# EAGLE board Stereo_Audio_Codec_Breakout_WM8960-Panel (EAGLE 9.6.2), part 1 of 5
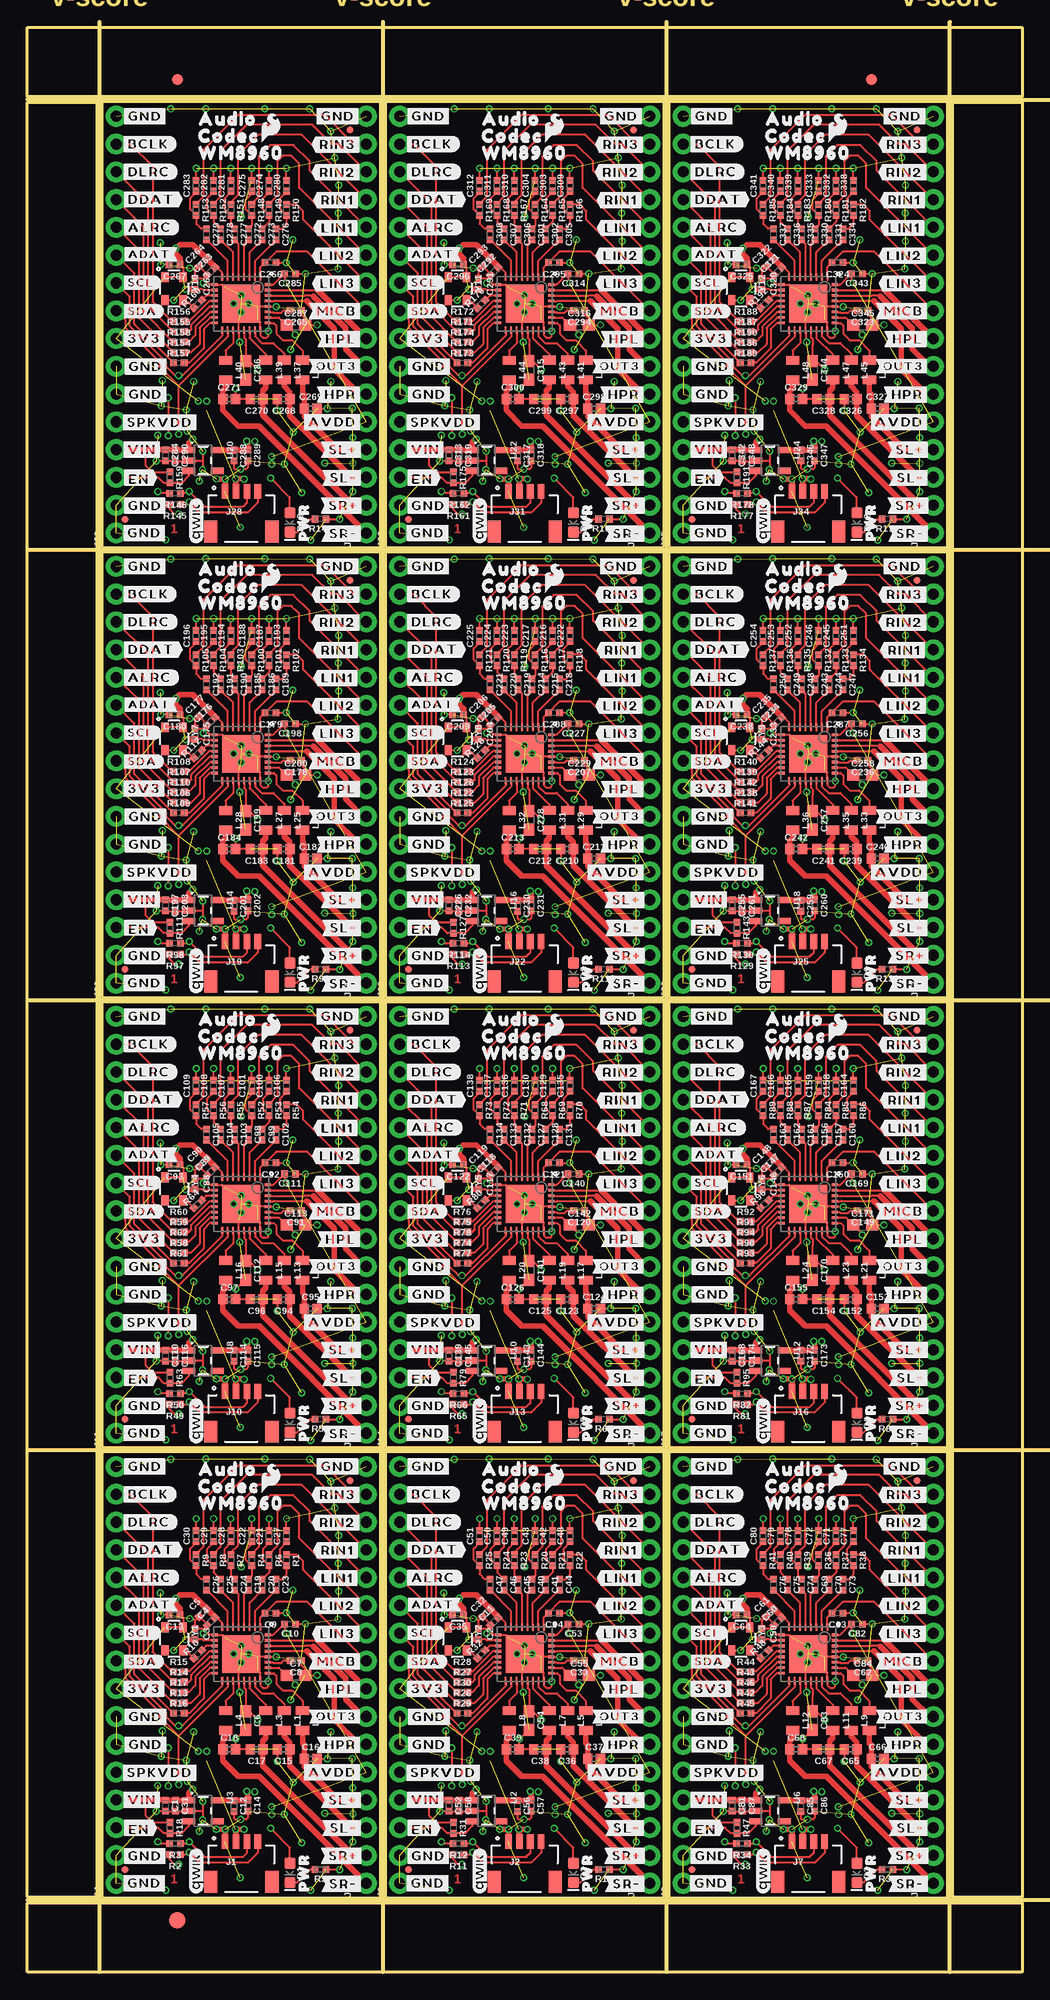
[diagram p0: board, top side]
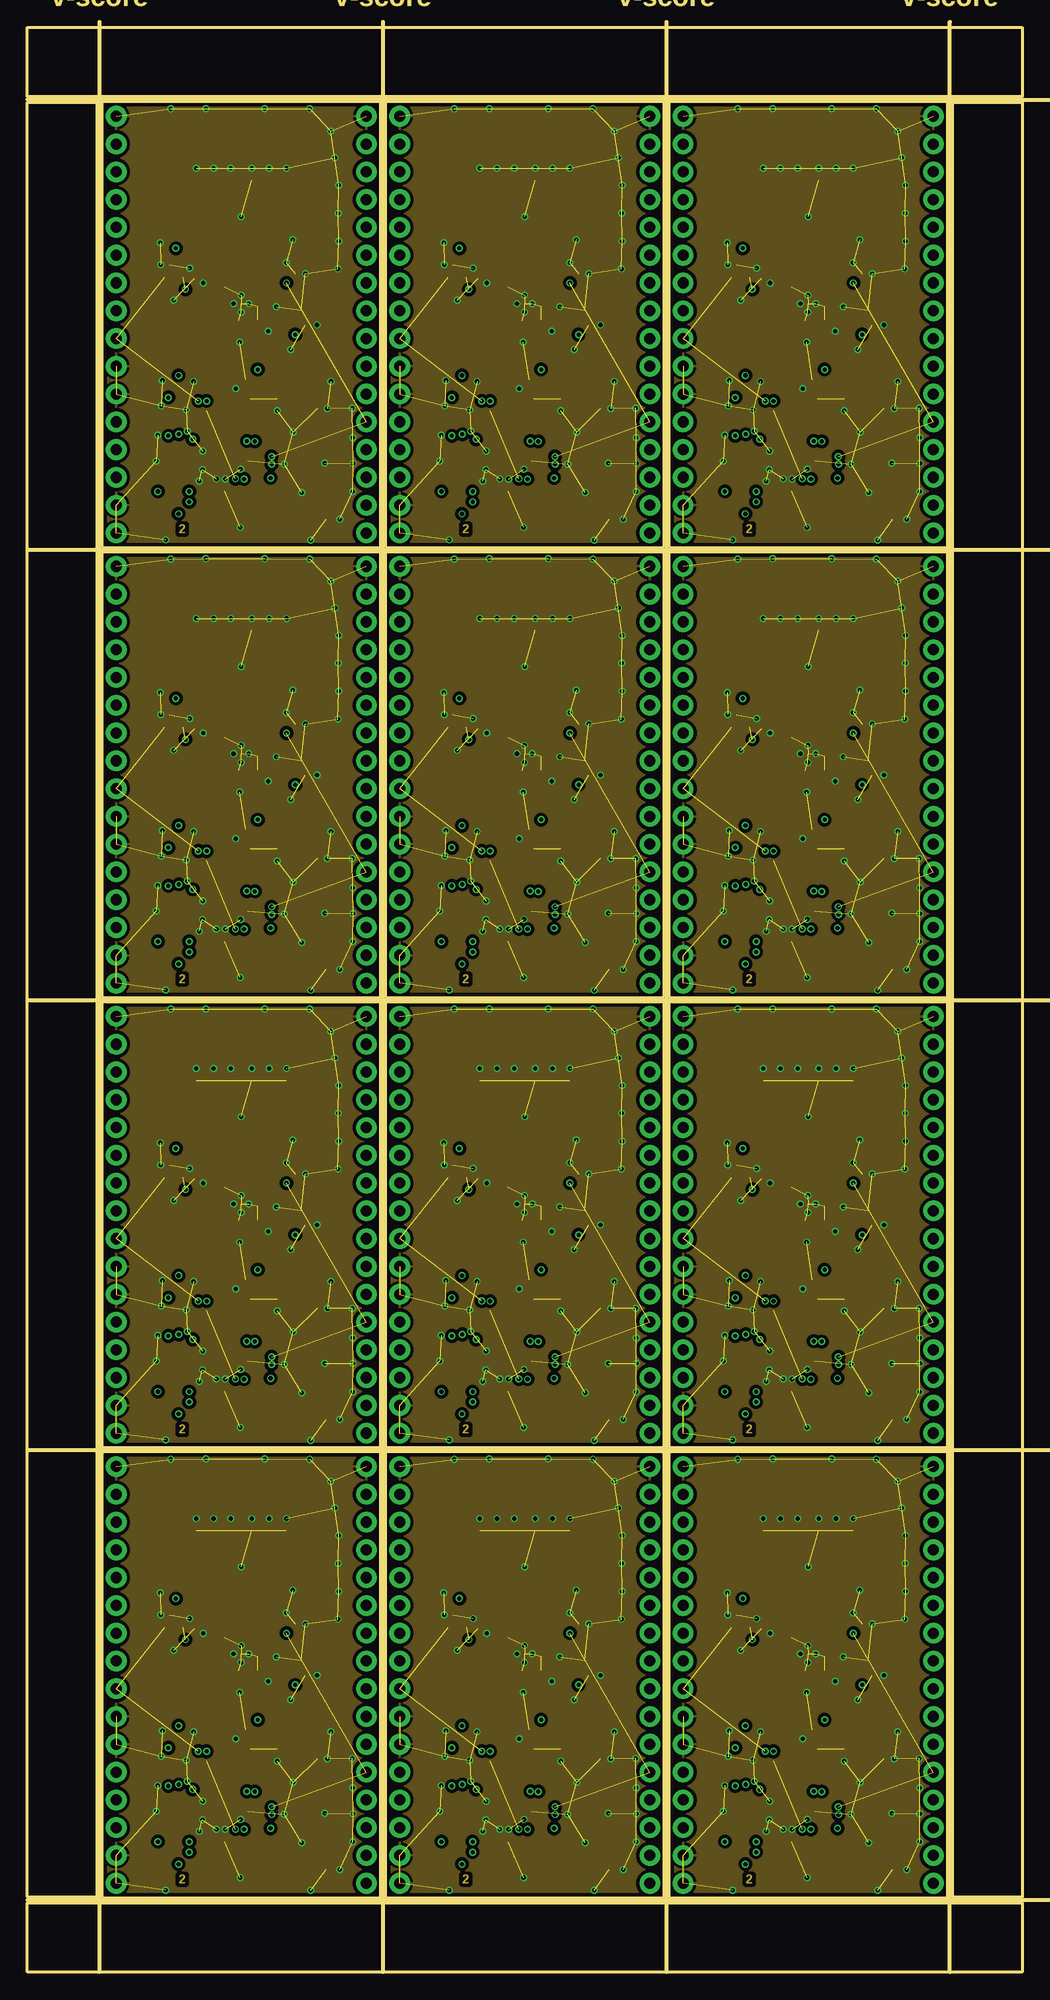
[diagram p1: board, inner layer Route2]
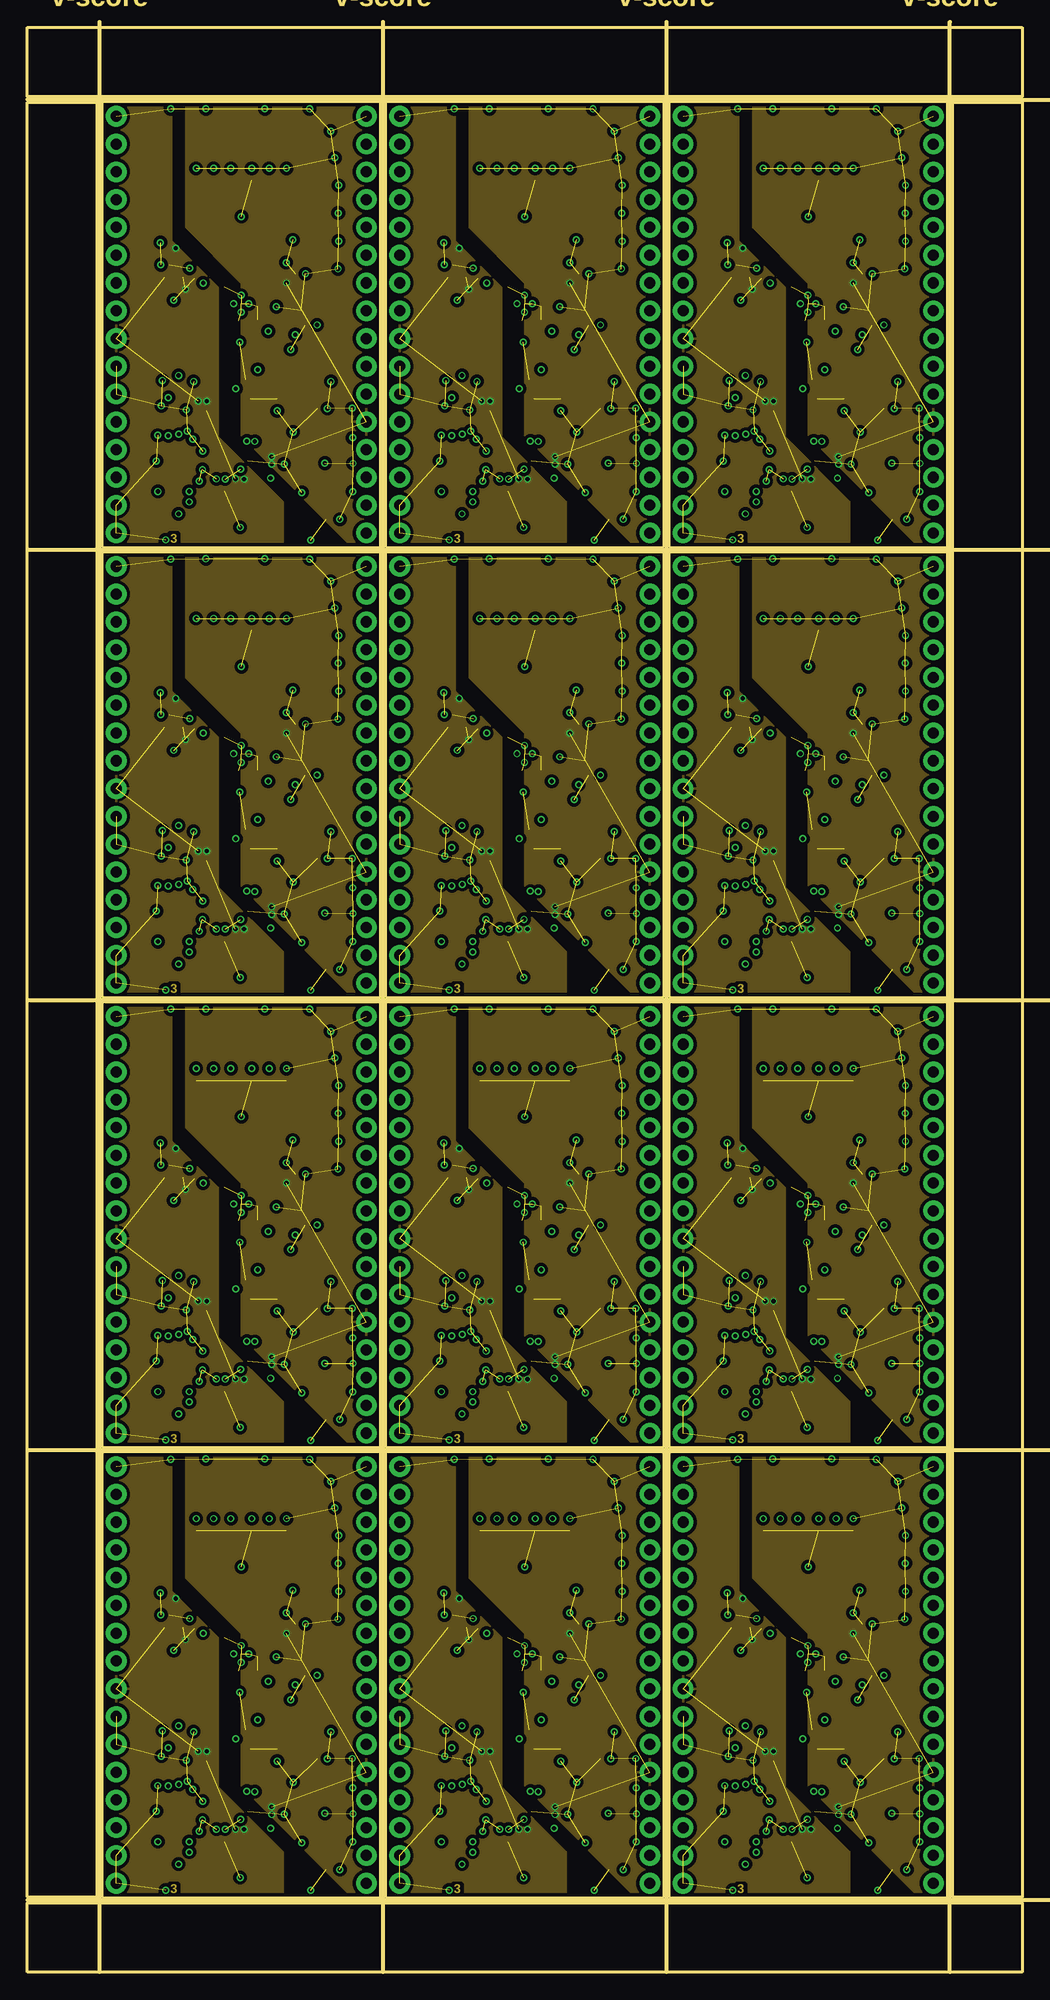
[diagram p2: board, inner layer Route15]
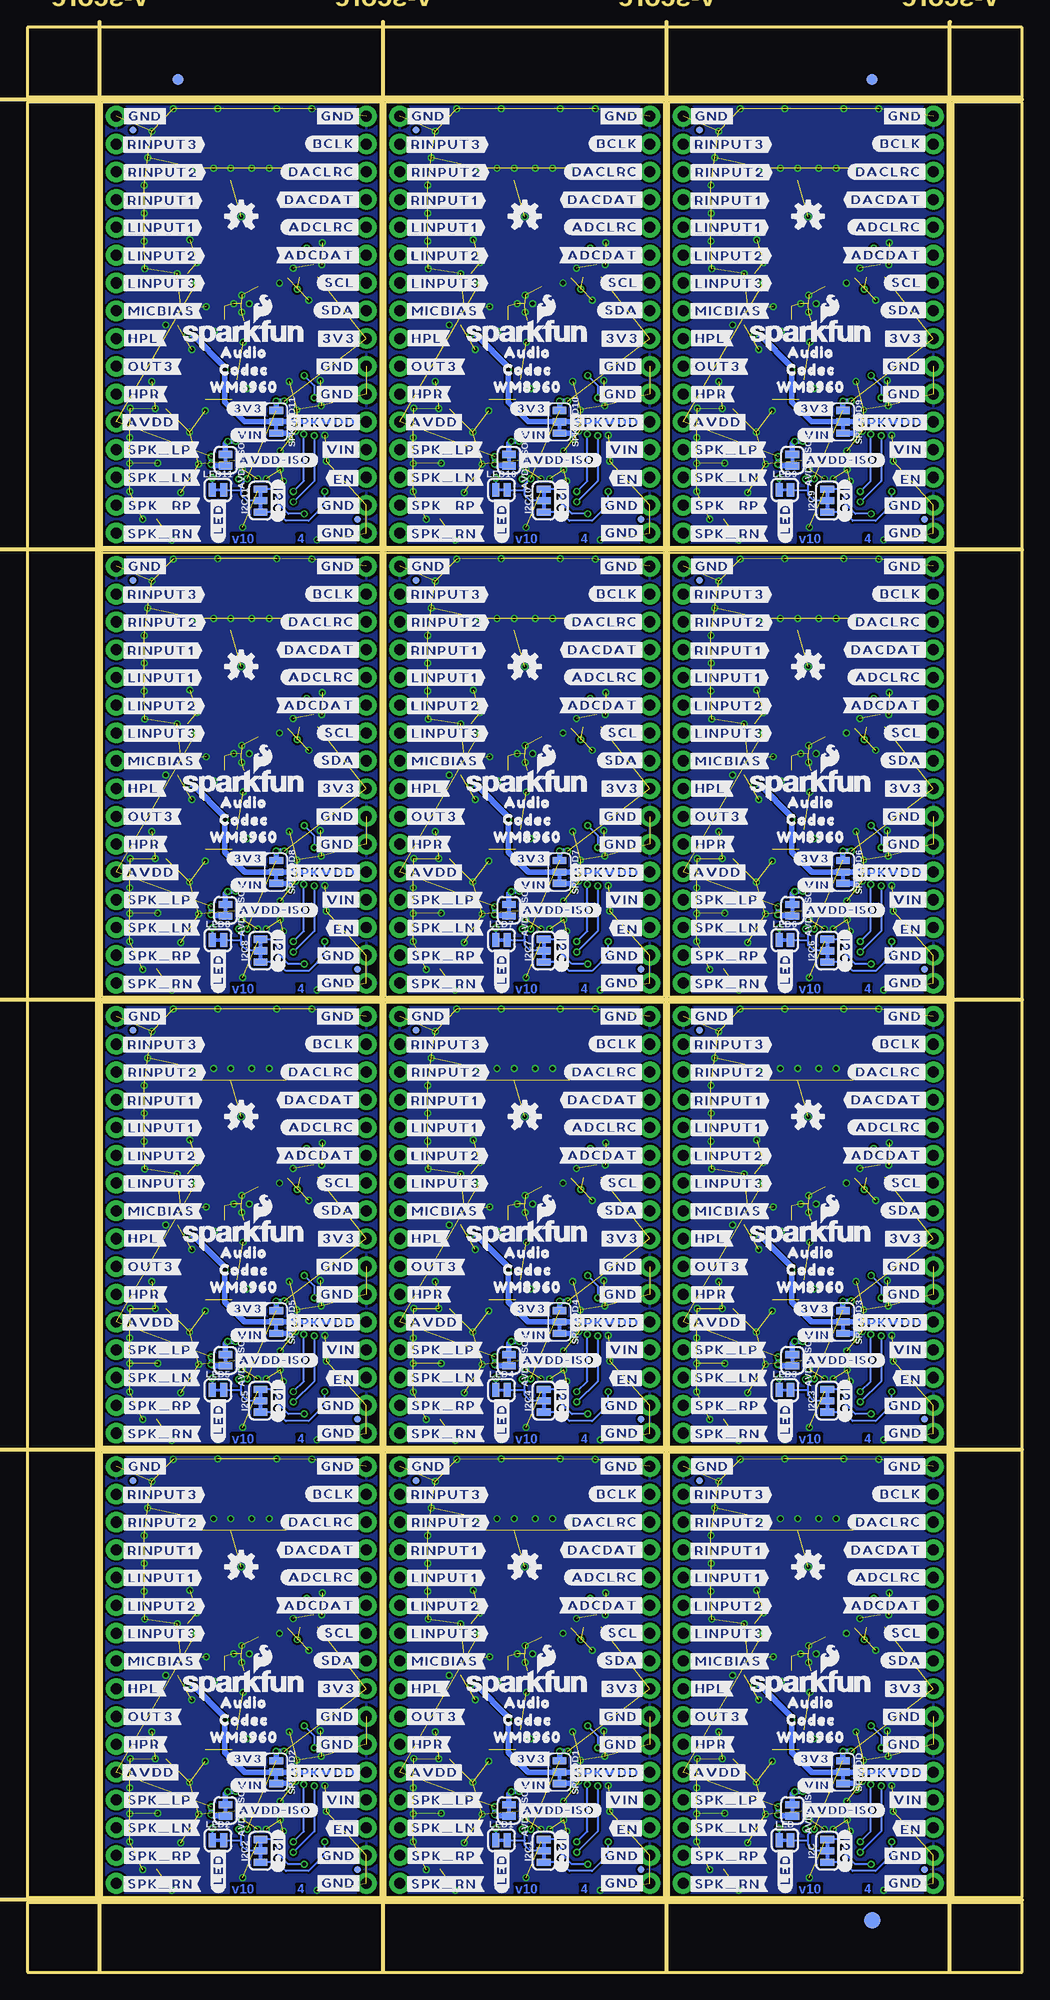
[diagram p3: board, bottom side, seen from below]

Size 90.93 x 177.8 mm. Coordinates in mm from the lower left corner, seen from the top.
Outline: 6.86,6.86 32.26,6.86 32.26,47.5 6.86,47.5 6.86,6.86
Outline: 32.77,6.86 58.17,6.86 58.17,47.5 32.77,47.5 32.77,6.86
Outline: 58.67,6.86 84.07,6.86 84.07,47.5 58.67,47.5 58.67,6.86
Outline: 6.86,48.01 32.26,48.01 32.26,88.65 6.86,88.65 6.86,48.01
Outline: 32.77,48.01 58.17,48.01 58.17,88.65 32.77,88.65 32.77,48.01
Outline: 58.67,48.01 84.07,48.01 84.07,88.65 58.67,88.65 58.67,48.01
Outline: 6.86,89.15 32.26,89.15 32.26,129.79 6.86,129.79 6.86,89.15
Outline: 32.77,89.15 58.17,89.15 58.17,129.79 32.77,129.79 32.77,89.15
Outline: 58.67,89.15 84.07,89.15 84.07,129.79 58.67,129.79 58.67,89.15
Outline: 6.86,130.3 32.26,130.3 32.26,170.94 6.86,170.94 6.86,130.3
Outline: 32.77,130.3 58.17,130.3 58.17,170.94 32.77,170.94 32.77,130.3
Outline: 58.67,130.3 84.07,130.3 84.07,170.94 58.67,170.94 58.67,130.3
Outline: 0,6.35 90.93,6.35 90.93,0 0,0 0,6.35
Outline: 84.58,170.94 90.93,170.94 90.93,6.86 84.58,6.86 84.58,170.94
Outline: 0,177.8 90.93,177.8 90.93,171.45 0,171.45 0,177.8
Outline: 0,170.94 6.35,170.94 6.35,6.86 0,6.86 0,170.94
Copper layers (1*2*15*16): Top 0.035559375mm / dielectric 0.47751875mm / Route2 0.035559375mm / dielectric 0.47751875mm / Route15 0.035559375mm / dielectric 0.47751875mm / Bottom 0.035559375mm
Design rules "Stereo_Audio_Codec_Breakout_WM8960": minimum track width 5mil, minimum drill 0.2mm, track to track 5mil, track to pad 5mil, pad to pad 5mil, via to via 5mil, smd to smd 5mil, copper to edge 7mil, drill to drill 7mil, minimum pad ring 5mil, minimum via ring 5mil, stop-mask expansion 2.5mil, vias tented up to drill 25mil, thermal gap 10mil
tRestrict: area 21.4,29.1 to 21.5,29.3; area 19.4,30.9 to 19.7,31; area 17.6,29 to 17.7,29.2; area 19.6,27.1 to 19.9,27.3; area 47.3,29.1 to 47.4,29.3; area 45.3,30.9 to 45.6,31; area 43.5,29 to 43.6,29.2; area 45.5,27.1 to 45.8,27.3; area 73.2,29.1 to 73.3,29.3; area 71.2,30.9 to 71.5,31; area 69.4,29 to 69.5,29.2; area 71.4,27.1 to 71.7,27.3; area 21.4,70.2 to 21.5,70.4; area 19.4,72.1 to 19.7,72.2; area 17.6,70.1 to 17.7,70.4; area 19.6,68.3 to 19.9,68.4; area 47.3,70.2 to 47.4,70.4; area 45.3,72.1 to 45.6,72.2; area 43.5,70.1 to 43.6,70.4; area 45.5,68.3 to 45.8,68.4; area 73.2,70.2 to 73.3,70.4; area 71.2,72.1 to 71.5,72.2; area 69.4,70.1 to 69.5,70.4; area 71.4,68.3 to 71.7,68.4; area 21.4,111.4 to 21.5,111.6; area 19.4,113.2 to 19.7,113.3; area 17.6,111.3 to 17.7,111.5; area 19.6,109.4 to 19.9,109.6; area 47.3,111.4 to 47.4,111.6; area 45.3,113.2 to 45.6,113.3; area 43.5,111.3 to 43.6,111.5; area 45.5,109.4 to 45.8,109.6; area 73.2,111.4 to 73.3,111.6; area 71.2,113.2 to 71.5,113.3; area 69.4,111.3 to 69.5,111.5; area 71.4,109.4 to 71.7,109.6; area 21.4,152.5 to 21.5,152.7; area 19.4,154.4 to 19.7,154.5; area 17.6,152.4 to 17.7,152.7; area 19.6,150.6 to 19.9,150.7; area 47.3,152.5 to 47.4,152.7; area 45.3,154.4 to 45.6,154.5; area 43.5,152.4 to 43.6,152.7; area 45.5,150.6 to 45.8,150.7; area 73.2,152.5 to 73.3,152.7; area 71.2,154.4 to 71.5,154.5; area 69.4,152.4 to 69.5,152.7; area 71.4,150.6 to 71.7,150.7
Milling: 9 lines

## Footprints (pad centres in the part's own frame; a part is rotated, then mirrored left to right if it is on the bottom)
SMT-JUMPER_2_NC_TRACE_SILK = smd 0.66 x 1.27: 1 -0.521,0; 2 0.521,0
0402-TIGHT = smd 0.6 x 0.6: 1 -0.5,0; 2 0.5,0
0603 = smd 1.1 x 1: 1 -0.85,0; 2 0.85,0
0402 = smd 0.85 x 0.9: 1 -0.58,0; 2 0.58,0
LED-0603 = smd 1 x 1: A -0.877,0; C 0.877,0
FIDUCIAL-1X2 = smd 1 x 1: 1 0,0
FIDUCIAL-1.5X3 = smd 1.5 x 1.5: 1 0,0
FIDUCIAL-MICRO = smd 0.635 x 0.635: 1 0,0
SMT-JUMPER_3_2-NC_TRACE_SILK = smd 0.66 x 1.27: 1 -1.041,0; 2 0,0; 3 1.041,0
JST04_1MM_RA = smd 0.6 x 1.35: 1 -1.5,0; 2 -0.5,0; 3 0.5,0; 4 1.5,0 | smd 1.2 x 2: NC1 2.8,-3.675; NC2 -2.8,-3.675
1X16_NO_SILK = drill 1.016 pad 1.88: 1 0,0; 2 2.54,0; 3 5.08,0; 4 7.62,0; 5 10.16,0; 6 12.7,0; 7 15.24,0; 8 17.78,0; 9 20.32,0; 10 22.86,0; 11 25.4,0; 12 27.94,0; 13 30.48,0; 14 33.02,0; 15 35.56,0; 16 38.1,0
0805 = smd 0.8 x 1.2: 1 -0.9,0; 2 0.9,0
SMT-JUMPER_3_1-NC_TRACE_SILK = smd 0.66 x 1.27: 1 -1.041,0; 2 0,0; 3 1.041,0
QFN-32 = smd 0.654 x 0.25: 1 -2.427,1.75; 2 -2.427,1.25; 3 -2.427,0.75; 4 -2.427,0.25; 5 -2.427,-0.25; 6 -2.427,-0.75; 7 -2.427,-1.25; 8 -2.427,-1.75; 17 2.427,-1.75; 18 2.427,-1.25; 19 2.427,-0.75; 20 2.427,-0.25; 21 2.427,0.25; 22 2.427,0.75; 23 2.427,1.25; 24 2.427,1.75 | smd 0.25 x 0.654: 9 -1.75,-2.427; 10 -1.25,-2.427; 11 -0.75,-2.427; 12 -0.25,-2.427; 13 0.25,-2.427; 14 0.75,-2.427; 15 1.25,-2.427; 16 1.75,-2.427; 25 1.75,2.427; 26 1.25,2.427; 27 0.75,2.427; 28 0.25,2.427; 29 -0.25,2.427; 30 -0.75,2.427; 31 -1.25,2.427; 32 -1.75,2.427 | smd 3.45 x 3.45: PADDLE 0,0
SOT23-5 = smd 0.55 x 1.2: 1 -0.95,-1.3; 2 0,-1.3; 3 0.95,-1.3; 4 0.95,1.3; 5 -0.95,1.3
RESONATOR-SMD-3.2X2.5 = smd 0.9 x 0.65: 1 -1.05,-0.825; 2 1.05,-0.825; 3 1.05,0.825; 4 -1.05,0.825

## Placement (x,y rotation side)
AVDD-ISO  [SMT-JUMPER_2_NC_TRACE_SILK]  21.01,14.79 270 bottom
AVDD-ISO1  [SMT-JUMPER_2_NC_TRACE_SILK]  46.91,14.79 270 bottom
AVDD-ISO2  [SMT-JUMPER_2_NC_TRACE_SILK]  72.82,14.79 270 bottom
AVDD-ISO3  [SMT-JUMPER_2_NC_TRACE_SILK]  21.01,55.93 270 bottom
AVDD-ISO4  [SMT-JUMPER_2_NC_TRACE_SILK]  46.91,55.93 270 bottom
AVDD-ISO5  [SMT-JUMPER_2_NC_TRACE_SILK]  72.82,55.93 270 bottom
AVDD-ISO6  [SMT-JUMPER_2_NC_TRACE_SILK]  21.01,97.08 270 bottom
AVDD-ISO7  [SMT-JUMPER_2_NC_TRACE_SILK]  46.91,97.08 270 bottom
AVDD-ISO8  [SMT-JUMPER_2_NC_TRACE_SILK]  72.82,97.08 270 bottom
AVDD-ISO9  [SMT-JUMPER_2_NC_TRACE_SILK]  21.01,138.23 270 bottom
AVDD-ISO10  [SMT-JUMPER_2_NC_TRACE_SILK]  46.91,138.23 270 bottom
AVDD-ISO11  [SMT-JUMPER_2_NC_TRACE_SILK]  72.82,138.23 270 bottom
C1  0.1uF  [0402-TIGHT]  12.61,15.23 270 top
C2  0.1uF  [0402-TIGHT]  41.22,30.91 270 top
C3  0.1uF  [0402-TIGHT]  15.31,30.91 270 top
C4  0.1uF  [0402-TIGHT]  16.79,32.06 45 top
C5  0.1uF  [0402-TIGHT]  16.05,32.87 45 top
C6  4.7uF  [0603]  19.94,23.01 270 top
C7  4.7uF  [0603]  24.54,27.14 0 top
C8  4.7uF  [0402-TIGHT]  24.53,28.49 180 top
C9  4.7uF  [0402-TIGHT]  22.23,32.85 180 top
C10  0.1uF  [0402-TIGHT]  24,31.83 180 top
C11  0.1uF  [0402-TIGHT]  42.69,32.06 45 top
C12  1.0uF  [0402-TIGHT]  18.87,15.2 270 top
C13  10nF  [0402-TIGHT]  13.46,32.66 180 top
C14  10uF  [0402-TIGHT]  20.14,15.23 270 top
C15  1nF  [0402]  23.42,20.37 180 top
C16  1nF  [0402]  25.9,19.51 0 top
C17  1nF  [0402]  20.95,20.38 180 top
C18  1nF  [0402]  18.45,20.37 0 top
C19  1.0uF  [0402-TIGHT]  20.19,35.43 270 top
C20  1.0uF  [0402-TIGHT]  21.46,35.43 270 top
C21  47nF  [0402-TIGHT]  22.1,39.88 90 top
C22  47nF  [0402-TIGHT]  20.51,39.88 90 top
C23  1.0uF  [0402-TIGHT]  22.73,35.43 270 top
C24  1.0uF  [0402-TIGHT]  18.92,35.43 270 top
C25  1.0uF  [0402-TIGHT]  17.65,35.43 270 top
C26  1.0uF  [0402-TIGHT]  16.38,35.43 270 top
C27  47nF  [0402-TIGHT]  23.69,39.88 90 top
C28  47nF  [0402-TIGHT]  18.61,39.88 90 top
C29  47nF  [0402-TIGHT]  17.02,39.88 90 top
C30  47nF  [0402-TIGHT]  15.43,39.88 90 top
C31  10uF  [0402-TIGHT]  13.53,15.21 270 top
C32  0.1uF  [0402-TIGHT]  41.96,32.87 45 top
C33  4.7uF  [0402-TIGHT]  50.44,28.49 180 top
C34  4.7uF  [0402-TIGHT]  48.13,32.85 180 top
C35  10nF  [0402-TIGHT]  39.37,32.66 180 top
C36  1nF  [0402]  49.33,20.37 180 top
C37  1nF  [0402]  51.8,19.51 0 top
C38  1nF  [0402]  46.86,20.38 180 top
C39  1nF  [0402]  44.36,20.37 0 top
C40  1.0uF  [0402-TIGHT]  46.1,35.43 270 top
C41  1.0uF  [0402-TIGHT]  47.37,35.43 270 top
C42  47nF  [0402-TIGHT]  48.01,39.88 90 top
C43  47nF  [0402-TIGHT]  46.42,39.88 90 top
C44  1.0uF  [0402-TIGHT]  48.64,35.43 270 top
C45  1.0uF  [0402-TIGHT]  44.83,35.43 270 top
C46  1.0uF  [0402-TIGHT]  43.56,35.43 270 top
C47  1.0uF  [0402-TIGHT]  42.29,35.43 270 top
C48  47nF  [0402-TIGHT]  49.59,39.88 90 top
C49  47nF  [0402-TIGHT]  44.51,39.88 90 top
C50  47nF  [0402-TIGHT]  42.93,39.88 90 top
C51  47nF  [0402-TIGHT]  41.34,39.88 90 top
C52  0.1uF  [0402-TIGHT]  38.52,15.23 270 top
C53  0.1uF  [0402-TIGHT]  49.91,31.83 180 top
C54  4.7uF  [0603]  45.85,23.01 270 top
C55  4.7uF  [0603]  50.45,27.14 0 top
C56  1.0uF  [0402-TIGHT]  44.78,15.2 270 top
C57  10uF  [0402-TIGHT]  46.05,15.23 270 top
C58  10uF  [0402-TIGHT]  39.43,15.21 270 top
C59  0.1uF  [0402-TIGHT]  67.13,30.91 270 top
C60  0.1uF  [0402-TIGHT]  68.6,32.06 45 top
C61  0.1uF  [0402-TIGHT]  67.87,32.87 45 top
C62  4.7uF  [0402-TIGHT]  76.35,28.49 180 top
C63  4.7uF  [0402-TIGHT]  74.04,32.85 180 top
C64  10nF  [0402-TIGHT]  65.28,32.66 180 top
C65  1nF  [0402]  75.24,20.37 180 top
C66  1nF  [0402]  77.71,19.51 0 top
C67  1nF  [0402]  72.77,20.38 180 top
C68  1nF  [0402]  70.27,20.37 0 top
C69  1.0uF  [0402-TIGHT]  72.01,35.43 270 top
C70  1.0uF  [0402-TIGHT]  73.28,35.43 270 top
C71  47nF  [0402-TIGHT]  73.91,39.88 90 top
C72  47nF  [0402-TIGHT]  72.33,39.88 90 top
C73  1.0uF  [0402-TIGHT]  74.55,35.43 270 top
C74  1.0uF  [0402-TIGHT]  70.74,35.43 270 top
C75  1.0uF  [0402-TIGHT]  69.47,35.43 270 top
C76  1.0uF  [0402-TIGHT]  68.2,35.43 270 top
C77  47nF  [0402-TIGHT]  75.5,39.88 90 top
C78  47nF  [0402-TIGHT]  70.42,39.88 90 top
C79  47nF  [0402-TIGHT]  68.83,39.88 90 top
C80  47nF  [0402-TIGHT]  67.25,39.88 90 top
C81  0.1uF  [0402-TIGHT]  64.43,15.23 270 top
C82  0.1uF  [0402-TIGHT]  75.82,31.83 180 top
C83  4.7uF  [0603]  71.76,23.01 270 top
C84  4.7uF  [0603]  76.35,27.14 0 top
C85  1.0uF  [0402-TIGHT]  70.69,15.2 270 top
C86  10uF  [0402-TIGHT]  71.96,15.23 270 top
C87  10uF  [0402-TIGHT]  65.34,15.21 270 top
C88  0.1uF  [0402-TIGHT]  15.31,72.06 270 top
C89  0.1uF  [0402-TIGHT]  16.79,73.2 45 top
C90  0.1uF  [0402-TIGHT]  16.05,74.02 45 top
C91  4.7uF  [0402-TIGHT]  24.53,69.63 180 top
C92  4.7uF  [0402-TIGHT]  22.23,73.99 180 top
C93  10nF  [0402-TIGHT]  13.46,73.81 180 top
C94  1nF  [0402]  23.42,61.52 180 top
C95  1nF  [0402]  25.9,60.66 0 top
C96  1nF  [0402]  20.95,61.52 180 top
C97  1nF  [0402]  18.45,61.52 0 top
C98  1.0uF  [0402-TIGHT]  20.19,76.58 270 top
C99  1.0uF  [0402-TIGHT]  21.46,76.58 270 top
C100  47nF  [0402-TIGHT]  22.1,81.03 90 top
C101  47nF  [0402-TIGHT]  20.51,81.03 90 top
C102  1.0uF  [0402-TIGHT]  22.73,76.58 270 top
C103  1.0uF  [0402-TIGHT]  18.92,76.58 270 top
C104  1.0uF  [0402-TIGHT]  17.65,76.58 270 top
C105  1.0uF  [0402-TIGHT]  16.38,76.58 270 top
C106  47nF  [0402-TIGHT]  23.69,81.03 90 top
C107  47nF  [0402-TIGHT]  18.61,81.03 90 top
C108  47nF  [0402-TIGHT]  17.02,81.03 90 top
C109  47nF  [0402-TIGHT]  15.43,81.03 90 top
C110  0.1uF  [0402-TIGHT]  12.61,56.38 270 top
C111  0.1uF  [0402-TIGHT]  24,72.97 180 top
C112  4.7uF  [0603]  19.94,64.16 270 top
C113  4.7uF  [0603]  24.54,68.29 0 top
C114  1.0uF  [0402-TIGHT]  18.87,56.35 270 top
C115  10uF  [0402-TIGHT]  20.14,56.38 270 top
C116  10uF  [0402-TIGHT]  13.53,56.36 270 top
C117  0.1uF  [0402-TIGHT]  41.22,72.06 270 top
C118  0.1uF  [0402-TIGHT]  42.69,73.2 45 top
C119  0.1uF  [0402-TIGHT]  41.96,74.02 45 top
C120  4.7uF  [0402-TIGHT]  50.44,69.63 180 top
C121  4.7uF  [0402-TIGHT]  48.13,73.99 180 top
C122  10nF  [0402-TIGHT]  39.37,73.81 180 top
C123  1nF  [0402]  49.33,61.52 180 top
C124  1nF  [0402]  51.8,60.66 0 top
C125  1nF  [0402]  46.86,61.52 180 top
C126  1nF  [0402]  44.36,61.52 0 top
C127  1.0uF  [0402-TIGHT]  46.1,76.58 270 top
C128  1.0uF  [0402-TIGHT]  47.37,76.58 270 top
C129  47nF  [0402-TIGHT]  48.01,81.03 90 top
C130  47nF  [0402-TIGHT]  46.42,81.03 90 top
C131  1.0uF  [0402-TIGHT]  48.64,76.58 270 top
C132  1.0uF  [0402-TIGHT]  44.83,76.58 270 top
C133  1.0uF  [0402-TIGHT]  43.56,76.58 270 top
C134  1.0uF  [0402-TIGHT]  42.29,76.58 270 top
C135  47nF  [0402-TIGHT]  49.59,81.03 90 top
C136  47nF  [0402-TIGHT]  44.51,81.03 90 top
C137  47nF  [0402-TIGHT]  42.93,81.03 90 top
C138  47nF  [0402-TIGHT]  41.34,81.03 90 top
C139  0.1uF  [0402-TIGHT]  38.52,56.38 270 top
C140  0.1uF  [0402-TIGHT]  49.91,72.97 180 top
C141  4.7uF  [0603]  45.85,64.16 270 top
C142  4.7uF  [0603]  50.45,68.29 0 top
C143  1.0uF  [0402-TIGHT]  44.78,56.35 270 top
C144  10uF  [0402-TIGHT]  46.05,56.38 270 top
C145  10uF  [0402-TIGHT]  39.43,56.36 270 top
C146  0.1uF  [0402-TIGHT]  67.13,72.06 270 top
C147  0.1uF  [0402-TIGHT]  68.6,73.2 45 top
C148  0.1uF  [0402-TIGHT]  67.87,74.02 45 top
C149  4.7uF  [0402-TIGHT]  76.35,69.63 180 top
C150  4.7uF  [0402-TIGHT]  74.04,73.99 180 top
C151  10nF  [0402-TIGHT]  65.28,73.81 180 top
C152  1nF  [0402]  75.24,61.52 180 top
C153  1nF  [0402]  77.71,60.66 0 top
C154  1nF  [0402]  72.77,61.52 180 top
C155  1nF  [0402]  70.27,61.52 0 top
C156  1.0uF  [0402-TIGHT]  72.01,76.58 270 top
C157  1.0uF  [0402-TIGHT]  73.28,76.58 270 top
C158  47nF  [0402-TIGHT]  73.91,81.03 90 top
C159  47nF  [0402-TIGHT]  72.33,81.03 90 top
C160  1.0uF  [0402-TIGHT]  74.55,76.58 270 top
C161  1.0uF  [0402-TIGHT]  70.74,76.58 270 top
C162  1.0uF  [0402-TIGHT]  69.47,76.58 270 top
C163  1.0uF  [0402-TIGHT]  68.2,76.58 270 top
C164  47nF  [0402-TIGHT]  75.5,81.03 90 top
C165  47nF  [0402-TIGHT]  70.42,81.03 90 top
C166  47nF  [0402-TIGHT]  68.83,81.03 90 top
C167  47nF  [0402-TIGHT]  67.25,81.03 90 top
C168  0.1uF  [0402-TIGHT]  64.43,56.38 270 top
C169  0.1uF  [0402-TIGHT]  75.82,72.97 180 top
C170  4.7uF  [0603]  71.76,64.16 270 top
C171  4.7uF  [0603]  76.35,68.29 0 top
C172  1.0uF  [0402-TIGHT]  70.69,56.35 270 top
C173  10uF  [0402-TIGHT]  71.96,56.38 270 top
C174  10uF  [0402-TIGHT]  65.34,56.36 270 top
C175  0.1uF  [0402-TIGHT]  15.31,113.21 270 top
C176  0.1uF  [0402-TIGHT]  16.79,114.35 45 top
C177  0.1uF  [0402-TIGHT]  16.05,115.17 45 top
C178  4.7uF  [0402-TIGHT]  24.53,110.78 180 top
C179  4.7uF  [0402-TIGHT]  22.23,115.14 180 top
C180  10nF  [0402-TIGHT]  13.46,114.96 180 top
C181  1nF  [0402]  23.42,102.67 180 top
C182  1nF  [0402]  25.9,101.81 0 top
C183  1nF  [0402]  20.95,102.67 180 top
C184  1nF  [0402]  18.45,102.67 0 top
C185  1.0uF  [0402-TIGHT]  20.19,117.73 270 top
C186  1.0uF  [0402-TIGHT]  21.46,117.73 270 top
C187  47nF  [0402-TIGHT]  22.1,122.17 90 top
C188  47nF  [0402-TIGHT]  20.51,122.17 90 top
C189  1.0uF  [0402-TIGHT]  22.73,117.73 270 top
C190  1.0uF  [0402-TIGHT]  18.92,117.73 270 top
C191  1.0uF  [0402-TIGHT]  17.65,117.73 270 top
C192  1.0uF  [0402-TIGHT]  16.38,117.73 270 top
C193  47nF  [0402-TIGHT]  23.69,122.17 90 top
C194  47nF  [0402-TIGHT]  18.61,122.17 90 top
C195  47nF  [0402-TIGHT]  17.02,122.17 90 top
C196  47nF  [0402-TIGHT]  15.43,122.17 90 top
C197  0.1uF  [0402-TIGHT]  12.61,97.52 270 top
C198  0.1uF  [0402-TIGHT]  24,114.12 180 top
C199  4.7uF  [0603]  19.94,105.3 270 top
C200  4.7uF  [0603]  24.54,109.44 0 top
C201  1.0uF  [0402-TIGHT]  18.87,97.5 270 top
C202  10uF  [0402-TIGHT]  20.14,97.52 270 top
C203  10uF  [0402-TIGHT]  13.53,97.51 270 top
C204  0.1uF  [0402-TIGHT]  41.22,113.21 270 top
C205  0.1uF  [0402-TIGHT]  42.69,114.35 45 top
C206  0.1uF  [0402-TIGHT]  41.96,115.17 45 top
C207  4.7uF  [0402-TIGHT]  50.44,110.78 180 top
C208  4.7uF  [0402-TIGHT]  48.13,115.14 180 top
C209  10nF  [0402-TIGHT]  39.37,114.96 180 top
C210  1nF  [0402]  49.33,102.67 180 top
C211  1nF  [0402]  51.8,101.81 0 top
C212  1nF  [0402]  46.86,102.67 180 top
C213  1nF  [0402]  44.36,102.67 0 top
C214  1.0uF  [0402-TIGHT]  46.1,117.73 270 top
C215  1.0uF  [0402-TIGHT]  47.37,117.73 270 top
C216  47nF  [0402-TIGHT]  48.01,122.17 90 top
C217  47nF  [0402-TIGHT]  46.42,122.17 90 top
C218  1.0uF  [0402-TIGHT]  48.64,117.73 270 top
C219  1.0uF  [0402-TIGHT]  44.83,117.73 270 top
C220  1.0uF  [0402-TIGHT]  43.56,117.73 270 top
C221  1.0uF  [0402-TIGHT]  42.29,117.73 270 top
C222  47nF  [0402-TIGHT]  49.59,122.17 90 top
C223  47nF  [0402-TIGHT]  44.51,122.17 90 top
C224  47nF  [0402-TIGHT]  42.93,122.17 90 top
C225  47nF  [0402-TIGHT]  41.34,122.17 90 top
C226  0.1uF  [0402-TIGHT]  38.52,97.52 270 top
C227  0.1uF  [0402-TIGHT]  49.91,114.12 180 top
C228  4.7uF  [0603]  45.85,105.3 270 top
C229  4.7uF  [0603]  50.45,109.44 0 top
C230  1.0uF  [0402-TIGHT]  44.78,97.5 270 top
C231  10uF  [0402-TIGHT]  46.05,97.52 270 top
C232  10uF  [0402-TIGHT]  39.43,97.51 270 top
C233  0.1uF  [0402-TIGHT]  67.13,113.21 270 top
C234  0.1uF  [0402-TIGHT]  68.6,114.35 45 top
C235  0.1uF  [0402-TIGHT]  67.87,115.17 45 top
C236  4.7uF  [0402-TIGHT]  76.35,110.78 180 top
C237  4.7uF  [0402-TIGHT]  74.04,115.14 180 top
C238  10nF  [0402-TIGHT]  65.28,114.96 180 top
C239  1nF  [0402]  75.24,102.67 180 top
C240  1nF  [0402]  77.71,101.81 0 top
C241  1nF  [0402]  72.77,102.67 180 top
C242  1nF  [0402]  70.27,102.67 0 top
C243  1.0uF  [0402-TIGHT]  72.01,117.73 270 top
C244  1.0uF  [0402-TIGHT]  73.28,117.73 270 top
C245  47nF  [0402-TIGHT]  73.91,122.17 90 top
C246  47nF  [0402-TIGHT]  72.33,122.17 90 top
C247  1.0uF  [0402-TIGHT]  74.55,117.73 270 top
C248  1.0uF  [0402-TIGHT]  70.74,117.73 270 top
C249  1.0uF  [0402-TIGHT]  69.47,117.73 270 top
C250  1.0uF  [0402-TIGHT]  68.2,117.73 270 top
C251  47nF  [0402-TIGHT]  75.5,122.17 90 top
C252  47nF  [0402-TIGHT]  70.42,122.17 90 top
C253  47nF  [0402-TIGHT]  68.83,122.17 90 top
C254  47nF  [0402-TIGHT]  67.25,122.17 90 top
C255  0.1uF  [0402-TIGHT]  64.43,97.52 270 top
C256  0.1uF  [0402-TIGHT]  75.82,114.12 180 top
C257  4.7uF  [0603]  71.76,105.3 270 top
C258  4.7uF  [0603]  76.35,109.44 0 top
C259  1.0uF  [0402-TIGHT]  70.69,97.5 270 top
C260  10uF  [0402-TIGHT]  71.96,97.52 270 top
C261  10uF  [0402-TIGHT]  65.34,97.51 270 top
C262  0.1uF  [0402-TIGHT]  15.31,154.36 270 top
C263  0.1uF  [0402-TIGHT]  16.79,155.5 45 top
C264  0.1uF  [0402-TIGHT]  16.05,156.31 45 top
C265  4.7uF  [0402-TIGHT]  24.53,151.93 180 top
C266  4.7uF  [0402-TIGHT]  22.23,156.29 180 top
C267  10nF  [0402-TIGHT]  13.46,156.1 180 top
C268  1nF  [0402]  23.42,143.82 180 top
C269  1nF  [0402]  25.9,142.95 0 top
C270  1nF  [0402]  20.95,143.82 180 top
C271  1nF  [0402]  18.45,143.81 0 top
C272  1.0uF  [0402-TIGHT]  20.19,158.88 270 top
C273  1.0uF  [0402-TIGHT]  21.46,158.88 270 top
C274  47nF  [0402-TIGHT]  22.1,163.32 90 top
C275  47nF  [0402-TIGHT]  20.51,163.32 90 top
C276  1.0uF  [0402-TIGHT]  22.73,158.88 270 top
C277  1.0uF  [0402-TIGHT]  18.92,158.88 270 top
C278  1.0uF  [0402-TIGHT]  17.65,158.88 270 top
C279  1.0uF  [0402-TIGHT]  16.38,158.88 270 top
C280  47nF  [0402-TIGHT]  23.69,163.32 90 top
C281  47nF  [0402-TIGHT]  18.61,163.32 90 top
C282  47nF  [0402-TIGHT]  17.02,163.32 90 top
C283  47nF  [0402-TIGHT]  15.43,163.32 90 top
C284  0.1uF  [0402-TIGHT]  12.61,138.67 270 top
C285  0.1uF  [0402-TIGHT]  24,155.27 180 top
C286  4.7uF  [0603]  19.94,146.45 270 top
C287  4.7uF  [0603]  24.54,150.59 0 top
C288  1.0uF  [0402-TIGHT]  18.87,138.65 270 top
C289  10uF  [0402-TIGHT]  20.14,138.67 270 top
C290  10uF  [0402-TIGHT]  13.53,138.66 270 top
C291  0.1uF  [0402-TIGHT]  41.22,154.36 270 top
C292  0.1uF  [0402-TIGHT]  42.69,155.5 45 top
C293  0.1uF  [0402-TIGHT]  41.96,156.31 45 top
C294  4.7uF  [0402-TIGHT]  50.44,151.93 180 top
C295  4.7uF  [0402-TIGHT]  48.13,156.29 180 top
C296  10nF  [0402-TIGHT]  39.37,156.1 180 top
C297  1nF  [0402]  49.33,143.82 180 top
C298  1nF  [0402]  51.8,142.95 0 top
C299  1nF  [0402]  46.86,143.82 180 top
C300  1nF  [0402]  44.36,143.81 0 top
C301  1.0uF  [0402-TIGHT]  46.1,158.88 270 top
C302  1.0uF  [0402-TIGHT]  47.37,158.88 270 top
C303  47nF  [0402-TIGHT]  48.01,163.32 90 top
C304  47nF  [0402-TIGHT]  46.42,163.32 90 top
C305  1.0uF  [0402-TIGHT]  48.64,158.88 270 top
C306  1.0uF  [0402-TIGHT]  44.83,158.88 270 top
C307  1.0uF  [0402-TIGHT]  43.56,158.88 270 top
C308  1.0uF  [0402-TIGHT]  42.29,158.88 270 top
C309  47nF  [0402-TIGHT]  49.59,163.32 90 top
C310  47nF  [0402-TIGHT]  44.51,163.32 90 top
C311  47nF  [0402-TIGHT]  42.93,163.32 90 top
C312  47nF  [0402-TIGHT]  41.34,163.32 90 top
C313  0.1uF  [0402-TIGHT]  38.52,138.67 270 top
C314  0.1uF  [0402-TIGHT]  49.91,155.27 180 top
C315  4.7uF  [0603]  45.85,146.45 270 top
C316  4.7uF  [0603]  50.45,150.59 0 top
C317  1.0uF  [0402-TIGHT]  44.78,138.65 270 top
C318  10uF  [0402-TIGHT]  46.05,138.67 270 top
C319  10uF  [0402-TIGHT]  39.43,138.66 270 top
C320  0.1uF  [0402-TIGHT]  67.13,154.36 270 top
C321  0.1uF  [0402-TIGHT]  68.6,155.5 45 top
C322  0.1uF  [0402-TIGHT]  67.87,156.31 45 top
C323  4.7uF  [0402-TIGHT]  76.35,151.93 180 top
C324  4.7uF  [0402-TIGHT]  74.04,156.29 180 top
C325  10nF  [0402-TIGHT]  65.28,156.1 180 top
C326  1nF  [0402]  75.24,143.82 180 top
C327  1nF  [0402]  77.71,142.95 0 top
C328  1nF  [0402]  72.77,143.82 180 top
C329  1nF  [0402]  70.27,143.81 0 top
C330  1.0uF  [0402-TIGHT]  72.01,158.88 270 top
C331  1.0uF  [0402-TIGHT]  73.28,158.88 270 top
C332  47nF  [0402-TIGHT]  73.91,163.32 90 top
C333  47nF  [0402-TIGHT]  72.33,163.32 90 top
C334  1.0uF  [0402-TIGHT]  74.55,158.88 270 top
C335  1.0uF  [0402-TIGHT]  70.74,158.88 270 top
C336  1.0uF  [0402-TIGHT]  69.47,158.88 270 top
C337  1.0uF  [0402-TIGHT]  68.2,158.88 270 top
C338  47nF  [0402-TIGHT]  75.5,163.32 90 top
C339  47nF  [0402-TIGHT]  70.42,163.32 90 top
C340  47nF  [0402-TIGHT]  68.83,163.32 90 top
C341  47nF  [0402-TIGHT]  67.25,163.32 90 top
C342  0.1uF  [0402-TIGHT]  64.43,138.67 270 top
C343  0.1uF  [0402-TIGHT]  75.82,155.27 180 top
C344  4.7uF  [0603]  71.76,146.45 270 top
C345  4.7uF  [0603]  76.35,150.59 0 top
C346  1.0uF  [0402-TIGHT]  70.69,138.65 270 top
C347  10uF  [0402-TIGHT]  71.96,138.67 270 top
C348  10uF  [0402-TIGHT]  65.34,138.66 270 top
D1  RED  [LED-0603]  24,9.08 270 top
D2  RED  [LED-0603]  49.91,9.08 270 top
D3  RED  [LED-0603]  75.82,9.08 270 top
D4  RED  [LED-0603]  24,50.23 270 top
D5  RED  [LED-0603]  49.91,50.23 270 top
D6  RED  [LED-0603]  75.82,50.23 270 top
D7  RED  [LED-0603]  24,91.38 270 top
D8  RED  [LED-0603]  49.91,91.38 270 top
D9  RED  [LED-0603]  75.82,91.38 270 top
D10  RED  [LED-0603]  24,132.52 270 top
D11  RED  [LED-0603]  49.91,132.52 270 top
D12  RED  [LED-0603]  75.82,132.52 270 top
E$1  [FIDUCIAL-1X2]  13.72,173.04 0 top
E$2  [FIDUCIAL-1X2]  13.72,173.04 0 bottom
E$3  [FIDUCIAL-1X2]  77.15,173.04 0 top
E$4  [FIDUCIAL-1X2]  77.15,173.04 0 bottom
E$5  [FIDUCIAL-1.5X3]  13.72,4.76 0 top
E$6  [FIDUCIAL-1.5X3]  13.72,4.76 0 bottom
FD1  FIDUCIALUFIDUCIAL  [FIDUCIAL-MICRO]  8.94,9.39 0 top
FD2  FIDUCIALUFIDUCIAL  [FIDUCIAL-MICRO]  8.94,9.39 0 bottom
FD3  FIDUCIALUFIDUCIAL  [FIDUCIAL-MICRO]  29.48,44.96 180 top
FD4  FIDUCIALUFIDUCIAL  [FIDUCIAL-MICRO]  29.48,44.96 180 bottom
FD5  FIDUCIALUFIDUCIAL  [FIDUCIAL-MICRO]  34.84,9.39 0 top
FD6  FIDUCIALUFIDUCIAL  [FIDUCIAL-MICRO]  34.84,9.39 0 bottom
FD7  FIDUCIALUFIDUCIAL  [FIDUCIAL-MICRO]  55.39,44.96 180 top
FD8  FIDUCIALUFIDUCIAL  [FIDUCIAL-MICRO]  55.39,44.96 180 bottom
FD9  FIDUCIALUFIDUCIAL  [FIDUCIAL-MICRO]  60.75,9.39 0 top
FD10  FIDUCIALUFIDUCIAL  [FIDUCIAL-MICRO]  60.75,9.39 0 bottom
FD11  FIDUCIALUFIDUCIAL  [FIDUCIAL-MICRO]  81.3,44.96 180 top
FD12  FIDUCIALUFIDUCIAL  [FIDUCIAL-MICRO]  81.3,44.96 180 bottom
FD13  FIDUCIALUFIDUCIAL  [FIDUCIAL-MICRO]  8.94,50.54 0 top
FD14  FIDUCIALUFIDUCIAL  [FIDUCIAL-MICRO]  8.94,50.54 0 bottom
FD15  FIDUCIALUFIDUCIAL  [FIDUCIAL-MICRO]  29.48,86.1 180 top
FD16  FIDUCIALUFIDUCIAL  [FIDUCIAL-MICRO]  29.48,86.1 180 bottom
FD17  FIDUCIALUFIDUCIAL  [FIDUCIAL-MICRO]  34.84,50.54 0 top
FD18  FIDUCIALUFIDUCIAL  [FIDUCIAL-MICRO]  34.84,50.54 0 bottom
FD19  FIDUCIALUFIDUCIAL  [FIDUCIAL-MICRO]  55.39,86.1 180 top
FD20  FIDUCIALUFIDUCIAL  [FIDUCIAL-MICRO]  55.39,86.1 180 bottom
FD21  FIDUCIALUFIDUCIAL  [FIDUCIAL-MICRO]  60.75,50.54 0 top
FD22  FIDUCIALUFIDUCIAL  [FIDUCIAL-MICRO]  60.75,50.54 0 bottom
FD23  FIDUCIALUFIDUCIAL  [FIDUCIAL-MICRO]  81.3,86.1 180 top
FD24  FIDUCIALUFIDUCIAL  [FIDUCIAL-MICRO]  81.3,86.1 180 bottom
FD25  FIDUCIALUFIDUCIAL  [FIDUCIAL-MICRO]  8.94,91.69 0 top
FD26  FIDUCIALUFIDUCIAL  [FIDUCIAL-MICRO]  8.94,91.69 0 bottom
FD27  FIDUCIALUFIDUCIAL  [FIDUCIAL-MICRO]  29.48,127.25 180 top
FD28  FIDUCIALUFIDUCIAL  [FIDUCIAL-MICRO]  29.48,127.25 180 bottom
FD29  FIDUCIALUFIDUCIAL  [FIDUCIAL-MICRO]  34.84,91.69 0 top
FD30  FIDUCIALUFIDUCIAL  [FIDUCIAL-MICRO]  34.84,91.69 0 bottom
FD31  FIDUCIALUFIDUCIAL  [FIDUCIAL-MICRO]  55.39,127.25 180 top
FD32  FIDUCIALUFIDUCIAL  [FIDUCIAL-MICRO]  55.39,127.25 180 bottom
FD33  FIDUCIALUFIDUCIAL  [FIDUCIAL-MICRO]  60.75,91.69 0 top
FD34  FIDUCIALUFIDUCIAL  [FIDUCIAL-MICRO]  60.75,91.69 0 bottom
FD35  FIDUCIALUFIDUCIAL  [FIDUCIAL-MICRO]  81.3,127.25 180 top
FD36  FIDUCIALUFIDUCIAL  [FIDUCIAL-MICRO]  81.3,127.25 180 bottom
FD37  FIDUCIALUFIDUCIAL  [FIDUCIAL-MICRO]  8.94,132.84 0 top
FD38  FIDUCIALUFIDUCIAL  [FIDUCIAL-MICRO]  8.94,132.84 0 bottom
FD39  FIDUCIALUFIDUCIAL  [FIDUCIAL-MICRO]  29.48,168.4 180 top
FD40  FIDUCIALUFIDUCIAL  [FIDUCIAL-MICRO]  29.48,168.4 180 bottom
FD41  FIDUCIALUFIDUCIAL  [FIDUCIAL-MICRO]  34.84,132.84 0 top
FD42  FIDUCIALUFIDUCIAL  [FIDUCIAL-MICRO]  34.84,132.84 0 bottom
FD43  FIDUCIALUFIDUCIAL  [FIDUCIAL-MICRO]  55.39,168.4 180 top
FD44  FIDUCIALUFIDUCIAL  [FIDUCIAL-MICRO]  55.39,168.4 180 bottom
FD45  FIDUCIALUFIDUCIAL  [FIDUCIAL-MICRO]  60.75,132.84 0 top
FD46  FIDUCIALUFIDUCIAL  [FIDUCIAL-MICRO]  60.75,132.84 0 bottom
FD47  FIDUCIALUFIDUCIAL  [FIDUCIAL-MICRO]  81.3,168.4 180 top
FD48  FIDUCIALUFIDUCIAL  [FIDUCIAL-MICRO]  81.3,168.4 180 bottom
I2C  JUMPER-SMT_3_2-NC_TRACE_SILK  [SMT-JUMPER_3_2-NC_TRACE_SILK]  17.81,11.09 90 bottom
I2C1  JUMPER-SMT_3_2-NC_TRACE_SILK  [SMT-JUMPER_3_2-NC_TRACE_SILK]  43.72,11.09 90 bottom
I2C2  JUMPER-SMT_3_2-NC_TRACE_SILK  [SMT-JUMPER_3_2-NC_TRACE_SILK]  69.62,11.09 90 bottom
I2C3  JUMPER-SMT_3_2-NC_TRACE_SILK  [SMT-JUMPER_3_2-NC_TRACE_SILK]  17.81,52.24 90 bottom
I2C4  JUMPER-SMT_3_2-NC_TRACE_SILK  [SMT-JUMPER_3_2-NC_TRACE_SILK]  43.72,52.24 90 bottom
I2C5  JUMPER-SMT_3_2-NC_TRACE_SILK  [SMT-JUMPER_3_2-NC_TRACE_SILK]  69.62,52.24 90 bottom
I2C6  JUMPER-SMT_3_2-NC_TRACE_SILK  [SMT-JUMPER_3_2-NC_TRACE_SILK]  17.81,93.39 90 bottom
I2C7  JUMPER-SMT_3_2-NC_TRACE_SILK  [SMT-JUMPER_3_2-NC_TRACE_SILK]  43.72,93.39 90 bottom
I2C8  JUMPER-SMT_3_2-NC_TRACE_SILK  [SMT-JUMPER_3_2-NC_TRACE_SILK]  69.62,93.39 90 bottom
I2C9  JUMPER-SMT_3_2-NC_TRACE_SILK  [SMT-JUMPER_3_2-NC_TRACE_SILK]  17.81,134.53 90 bottom
I2C10  JUMPER-SMT_3_2-NC_TRACE_SILK  [SMT-JUMPER_3_2-NC_TRACE_SILK]  43.72,134.53 90 bottom
I2C11  JUMPER-SMT_3_2-NC_TRACE_SILK  [SMT-JUMPER_3_2-NC_TRACE_SILK]  69.62,134.53 90 bottom
J1  QWIIC  [JST04_1MM_RA]  19.56,11.94 0 top
J2  QWIIC  [JST04_1MM_RA]  45.47,11.94 0 top
J3  [1X16_NO_SILK]  34.04,8.13 90 top
J4  [1X16_NO_SILK]  8.13,8.13 90 top
J5  [1X16_NO_SILK]  30.99,8.13 90 top
J6  [1X16_NO_SILK]  56.9,8.13 90 top
J7  QWIIC  [JST04_1MM_RA]  71.37,11.94 0 top
J8  [1X16_NO_SILK]  59.94,8.13 90 top
J9  [1X16_NO_SILK]  82.8,8.13 90 top
J10  QWIIC  [JST04_1MM_RA]  19.56,53.09 0 top
J11  [1X16_NO_SILK]  8.13,49.28 90 top
J12  [1X16_NO_SILK]  30.99,49.28 90 top
J13  QWIIC  [JST04_1MM_RA]  45.47,53.09 0 top
J14  [1X16_NO_SILK]  34.04,49.28 90 top
J15  [1X16_NO_SILK]  56.9,49.28 90 top
J16  QWIIC  [JST04_1MM_RA]  71.37,53.09 0 top
J17  [1X16_NO_SILK]  59.94,49.28 90 top
J18  [1X16_NO_SILK]  82.8,49.28 90 top
J19  QWIIC  [JST04_1MM_RA]  19.56,94.23 0 top
J20  [1X16_NO_SILK]  8.13,90.42 90 top
J21  [1X16_NO_SILK]  30.99,90.42 90 top
J22  QWIIC  [JST04_1MM_RA]  45.47,94.23 0 top
J23  [1X16_NO_SILK]  34.04,90.42 90 top
J24  [1X16_NO_SILK]  56.9,90.42 90 top
J25  QWIIC  [JST04_1MM_RA]  71.37,94.23 0 top
J26  [1X16_NO_SILK]  59.94,90.42 90 top
J27  [1X16_NO_SILK]  82.8,90.42 90 top
J28  QWIIC  [JST04_1MM_RA]  19.56,135.38 0 top
J29  [1X16_NO_SILK]  8.13,131.57 90 top
J30  [1X16_NO_SILK]  30.99,131.57 90 top
J31  QWIIC  [JST04_1MM_RA]  45.47,135.38 0 top
J32  [1X16_NO_SILK]  34.04,131.57 90 top
J33  [1X16_NO_SILK]  56.9,131.57 90 top
J34  QWIIC  [JST04_1MM_RA]  71.37,135.38 0 top
J35  [1X16_NO_SILK]  59.94,131.57 90 top
J36  [1X16_NO_SILK]  82.8,131.57 90 top
L1  220Ω  [0805]  23.48,23.02 270 top
L2  220Ω  [0805]  25.15,23.02 270 top
L3  220Ω  [0805]  21.81,23.02 270 top
L4  220Ω  [0805]  18.13,23.01 270 top
L5  220Ω  [0805]  49.39,23.02 270 top
L6  220Ω  [0805]  51.06,23.02 270 top
L7  220Ω  [0805]  47.71,23.02 270 top
L8  220Ω  [0805]  44.04,23.01 270 top
L9  220Ω  [0805]  75.3,23.02 270 top
L10  220Ω  [0805]  76.97,23.02 270 top
L11  220Ω  [0805]  73.62,23.02 270 top
L12  220Ω  [0805]  69.94,23.01 270 top
L13  220Ω  [0805]  23.48,64.17 270 top
L14  220Ω  [0805]  25.15,64.17 270 top
L15  220Ω  [0805]  21.81,64.17 270 top
L16  220Ω  [0805]  18.13,64.16 270 top
L17  220Ω  [0805]  49.39,64.17 270 top
L18  220Ω  [0805]  51.06,64.17 270 top
L19  220Ω  [0805]  47.71,64.17 270 top
L20  220Ω  [0805]  44.04,64.16 270 top
L21  220Ω  [0805]  75.3,64.17 270 top
L22  220Ω  [0805]  76.97,64.17 270 top
L23  220Ω  [0805]  73.62,64.17 270 top
L24  220Ω  [0805]  69.94,64.16 270 top
L25  220Ω  [0805]  23.48,105.32 270 top
L26  220Ω  [0805]  25.15,105.32 270 top
L27  220Ω  [0805]  21.81,105.32 270 top
L28  220Ω  [0805]  18.13,105.31 270 top
L29  220Ω  [0805]  49.39,105.32 270 top
L30  220Ω  [0805]  51.06,105.32 270 top
L31  220Ω  [0805]  47.71,105.32 270 top
L32  220Ω  [0805]  44.04,105.31 270 top
L33  220Ω  [0805]  75.3,105.32 270 top
L34  220Ω  [0805]  76.97,105.32 270 top
L35  220Ω  [0805]  73.62,105.32 270 top
L36  220Ω  [0805]  69.94,105.31 270 top
L37  220Ω  [0805]  23.48,146.46 270 top
L38  220Ω  [0805]  25.15,146.46 270 top
L39  220Ω  [0805]  21.81,146.46 270 top
L40  220Ω  [0805]  18.13,146.46 270 top
L41  220Ω  [0805]  49.39,146.46 270 top
L42  220Ω  [0805]  51.06,146.46 270 top
L43  220Ω  [0805]  47.71,146.46 270 top
L44  220Ω  [0805]  44.04,146.46 270 top
L45  220Ω  [0805]  75.3,146.46 270 top
L46  220Ω  [0805]  76.97,146.46 270 top
L47  220Ω  [0805]  73.62,146.46 270 top
L48  220Ω  [0805]  69.94,146.46 270 top
LED  [SMT-JUMPER_2_NC_TRACE_SILK]  21.69,12.07 0 bottom
LED1  [SMT-JUMPER_2_NC_TRACE_SILK]  47.6,12.07 0 bottom
LED2  [SMT-JUMPER_2_NC_TRACE_SILK]  73.51,12.07 0 bottom
LED3  [SMT-JUMPER_2_NC_TRACE_SILK]  21.69,53.22 0 bottom
LED4  [SMT-JUMPER_2_NC_TRACE_SILK]  47.6,53.22 0 bottom
LED5  [SMT-JUMPER_2_NC_TRACE_SILK]  73.51,53.22 0 bottom
LED6  [SMT-JUMPER_2_NC_TRACE_SILK]  21.69,94.36 0 bottom
LED7  [SMT-JUMPER_2_NC_TRACE_SILK]  47.6,94.36 0 bottom
LED8  [SMT-JUMPER_2_NC_TRACE_SILK]  73.51,94.36 0 bottom
LED9  [SMT-JUMPER_2_NC_TRACE_SILK]  21.69,135.51 0 bottom
LED10  [SMT-JUMPER_2_NC_TRACE_SILK]  47.6,135.51 0 bottom
LED11  [SMT-JUMPER_2_NC_TRACE_SILK]  73.51,135.51 0 bottom
LOGO1  SFE_LOGO_NAME_FLAME.1_INCH  [SFE_LOGO_NAME_FLAME_.1]  19.32,26.23 0 bottom
LOGO2  QWIIC_LOGO_4MM  [QWIIC_4MM]  41.36,9.25 90 top
LOGO3  QWIIC_LOGO_4MM  [QWIIC_4MM]  15.45,9.25 90 top
LOGO4  OSHW-LOGOS  [OSHW-LOGO-S]  19.56,37.07 0 bottom
LOGO5  OSHW-LOGOS  [OSHW-LOGO-S]  45.47,37.07 0 bottom
LOGO6  SFE_LOGO_NAME_FLAME.1_INCH  [SFE_LOGO_NAME_FLAME_.1]  45.22,26.23 0 bottom
LOGO7  QWIIC_LOGO_4MM  [QWIIC_4MM]  67.26,9.25 90 top
LOGO8  OSHW-LOGOS  [OSHW-LOGO-S]  71.38,37.07 0 bottom
LOGO9  SFE_LOGO_NAME_FLAME.1_INCH  [SFE_LOGO_NAME_FLAME_.1]  71.13,26.23 0 bottom
LOGO10  QWIIC_LOGO_4MM  [QWIIC_4MM]  15.45,50.4 90 top
LOGO11  OSHW-LOGOS  [OSHW-LOGO-S]  19.56,78.22 0 bottom
LOGO12  SFE_LOGO_NAME_FLAME.1_INCH  [SFE_LOGO_NAME_FLAME_.1]  19.32,67.37 0 bottom
LOGO13  QWIIC_LOGO_4MM  [QWIIC_4MM]  41.36,50.4 90 top
LOGO14  OSHW-LOGOS  [OSHW-LOGO-S]  45.47,78.22 0 bottom
LOGO15  SFE_LOGO_NAME_FLAME.1_INCH  [SFE_LOGO_NAME_FLAME_.1]  45.22,67.37 0 bottom
LOGO16  QWIIC_LOGO_4MM  [QWIIC_4MM]  67.26,50.4 90 top
LOGO17  OSHW-LOGOS  [OSHW-LOGO-S]  71.38,78.22 0 bottom
LOGO18  SFE_LOGO_NAME_FLAME.1_INCH  [SFE_LOGO_NAME_FLAME_.1]  71.13,67.37 0 bottom
LOGO19  QWIIC_LOGO_4MM  [QWIIC_4MM]  15.45,91.55 90 top
LOGO20  OSHW-LOGOS  [OSHW-LOGO-S]  19.56,119.37 0 bottom
LOGO21  SFE_LOGO_NAME_FLAME.1_INCH  [SFE_LOGO_NAME_FLAME_.1]  19.32,108.52 0 bottom
LOGO22  QWIIC_LOGO_4MM  [QWIIC_4MM]  41.36,91.55 90 top
LOGO23  OSHW-LOGOS  [OSHW-LOGO-S]  45.47,119.37 0 bottom
LOGO24  SFE_LOGO_NAME_FLAME.1_INCH  [SFE_LOGO_NAME_FLAME_.1]  45.22,108.52 0 bottom
LOGO25  QWIIC_LOGO_4MM  [QWIIC_4MM]  67.26,91.55 90 top
LOGO26  OSHW-LOGOS  [OSHW-LOGO-S]  71.38,119.37 0 bottom
LOGO27  SFE_LOGO_NAME_FLAME.1_INCH  [SFE_LOGO_NAME_FLAME_.1]  71.13,108.52 0 bottom
LOGO28  QWIIC_LOGO_4MM  [QWIIC_4MM]  15.45,132.7 90 top
LOGO29  OSHW-LOGOS  [OSHW-LOGO-S]  19.56,160.52 0 bottom
LOGO30  SFE_LOGO_NAME_FLAME.1_INCH  [SFE_LOGO_NAME_FLAME_.1]  19.32,149.67 0 bottom
LOGO31  QWIIC_LOGO_4MM  [QWIIC_4MM]  41.36,132.7 90 top
LOGO32  OSHW-LOGOS  [OSHW-LOGO-S]  45.47,160.52 0 bottom
LOGO33  SFE_LOGO_NAME_FLAME.1_INCH  [SFE_LOGO_NAME_FLAME_.1]  45.22,149.67 0 bottom
LOGO34  QWIIC_LOGO_4MM  [QWIIC_4MM]  67.26,132.7 90 top
LOGO35  OSHW-LOGOS  [OSHW-LOGO-S]  71.38,160.52 0 bottom
LOGO36  SFE_LOGO_NAME_FLAME.1_INCH  [SFE_LOGO_NAME_FLAME_.1]  71.13,149.67 0 bottom
R1  100  [0402-TIGHT]  23.69,37.66 270 top
R2  2.2k  [0402-TIGHT]  13.5,10.76 180 top
R3  2.2k  [0402-TIGHT]  13.51,11.76 180 top
R4  100  [0402-TIGHT]  20.51,37.66 270 top
R5  1k  [0402-TIGHT]  26.8,9.4 180 top
R6  100  [0402-TIGHT]  22.1,37.66 270 top
R7  100  [0402-TIGHT]  18.61,37.66 270 top
R8  100  [0402-TIGHT]  17.02,37.66 270 top
R9  100  [0402-TIGHT]  15.43,37.66 270 top
R10  10Ω  [0402-TIGHT]  15.58,29.06 45 top
R11  2.2k  [0402-TIGHT]  39.41,10.76 180 top
R12  2.2k  [0402-TIGHT]  39.42,11.76 180 top
R13  10Ω  [0402-TIGHT]  13.84,24.64 0 top
R14  10Ω  [0402-TIGHT]  13.84,26.54 0 top
R15  10Ω  [0402-TIGHT]  13.84,27.5 0 top
R16  10Ω  [0402-TIGHT]  13.84,23.69 0 top
R17  10Ω  [0402-TIGHT]  13.84,25.59 0 top
R18  100k  [0402-TIGHT]  13.04,13.2 270 top
R19  1k  [0402-TIGHT]  52.7,9.4 180 top
R20  100  [0402-TIGHT]  46.42,37.66 270 top
R21  100  [0402-TIGHT]  48.01,37.66 270 top
R22  100  [0402-TIGHT]  49.59,37.66 270 top
R23  100  [0402-TIGHT]  44.51,37.66 270 top
R24  100  [0402-TIGHT]  42.93,37.66 270 top
R25  100  [0402-TIGHT]  41.34,37.66 270 top
R26  10Ω  [0402-TIGHT]  39.75,24.64 0 top
R27  10Ω  [0402-TIGHT]  39.75,26.54 0 top
R28  10Ω  [0402-TIGHT]  39.75,27.5 0 top
R29  10Ω  [0402-TIGHT]  39.75,23.69 0 top
R30  10Ω  [0402-TIGHT]  39.75,25.59 0 top
R31  100k  [0402-TIGHT]  38.95,13.2 270 top
R32  10Ω  [0402-TIGHT]  41.49,29.06 45 top
R33  2.2k  [0402-TIGHT]  65.31,10.76 180 top
R34  2.2k  [0402-TIGHT]  65.32,11.76 180 top
R35  1k  [0402-TIGHT]  78.61,9.4 180 top
R36  100  [0402-TIGHT]  72.33,37.66 270 top
R37  100  [0402-TIGHT]  73.91,37.66 270 top
R38  100  [0402-TIGHT]  75.5,37.66 270 top
R39  100  [0402-TIGHT]  70.42,37.66 270 top
R40  100  [0402-TIGHT]  68.83,37.66 270 top
R41  100  [0402-TIGHT]  67.25,37.66 270 top
R42  10Ω  [0402-TIGHT]  65.66,24.64 0 top
R43  10Ω  [0402-TIGHT]  65.66,26.54 0 top
R44  10Ω  [0402-TIGHT]  65.66,27.5 0 top
R45  10Ω  [0402-TIGHT]  65.66,23.69 0 top
R46  10Ω  [0402-TIGHT]  65.66,25.59 0 top
R47  100k  [0402-TIGHT]  64.86,13.2 270 top
R48  10Ω  [0402-TIGHT]  67.4,29.06 45 top
R49  2.2k  [0402-TIGHT]  13.5,51.91 180 top
R50  2.2k  [0402-TIGHT]  13.51,52.91 180 top
R51  1k  [0402-TIGHT]  26.8,50.55 180 top
R52  100  [0402-TIGHT]  20.51,78.8 270 top
R53  100  [0402-TIGHT]  22.1,78.8 270 top
R54  100  [0402-TIGHT]  23.69,78.8 270 top
R55  100  [0402-TIGHT]  18.61,78.8 270 top
R56  100  [0402-TIGHT]  17.02,78.8 270 top
R57  100  [0402-TIGHT]  15.43,78.8 270 top
R58  10Ω  [0402-TIGHT]  13.84,65.79 0 top
R59  10Ω  [0402-TIGHT]  13.84,67.69 0 top
R60  10Ω  [0402-TIGHT]  13.84,68.64 0 top
R61  10Ω  [0402-TIGHT]  13.84,64.83 0 top
R62  10Ω  [0402-TIGHT]  13.84,66.74 0 top
R63  100k  [0402-TIGHT]  13.04,54.35 270 top
R64  10Ω  [0402-TIGHT]  15.58,70.21 45 top
R65  2.2k  [0402-TIGHT]  39.41,51.91 180 top
R66  2.2k  [0402-TIGHT]  39.42,52.91 180 top
R67  1k  [0402-TIGHT]  52.7,50.55 180 top
R68  100  [0402-TIGHT]  46.42,78.8 270 top
R69  100  [0402-TIGHT]  48.01,78.8 270 top
R70  100  [0402-TIGHT]  49.59,78.8 270 top
R71  100  [0402-TIGHT]  44.51,78.8 270 top
R72  100  [0402-TIGHT]  42.93,78.8 270 top
R73  100  [0402-TIGHT]  41.34,78.8 270 top
R74  10Ω  [0402-TIGHT]  39.75,65.79 0 top
R75  10Ω  [0402-TIGHT]  39.75,67.69 0 top
R76  10Ω  [0402-TIGHT]  39.75,68.64 0 top
R77  10Ω  [0402-TIGHT]  39.75,64.83 0 top
R78  10Ω  [0402-TIGHT]  39.75,66.74 0 top
R79  100k  [0402-TIGHT]  38.95,54.35 270 top
R80  10Ω  [0402-TIGHT]  41.49,70.21 45 top
R81  2.2k  [0402-TIGHT]  65.31,51.91 180 top
R82  2.2k  [0402-TIGHT]  65.32,52.91 180 top
R83  1k  [0402-TIGHT]  78.61,50.55 180 top
R84  100  [0402-TIGHT]  72.33,78.8 270 top
R85  100  [0402-TIGHT]  73.91,78.8 270 top
R86  100  [0402-TIGHT]  75.5,78.8 270 top
R87  100  [0402-TIGHT]  70.42,78.8 270 top
R88  100  [0402-TIGHT]  68.83,78.8 270 top
R89  100  [0402-TIGHT]  67.25,78.8 270 top
R90  10Ω  [0402-TIGHT]  65.66,65.79 0 top
R91  10Ω  [0402-TIGHT]  65.66,67.69 0 top
R92  10Ω  [0402-TIGHT]  65.66,68.64 0 top
R93  10Ω  [0402-TIGHT]  65.66,64.83 0 top
R94  10Ω  [0402-TIGHT]  65.66,66.74 0 top
R95  100k  [0402-TIGHT]  64.86,54.35 270 top
R96  10Ω  [0402-TIGHT]  67.4,70.21 45 top
R97  2.2k  [0402-TIGHT]  13.5,93.06 180 top
R98  2.2k  [0402-TIGHT]  13.51,94.05 180 top
R99  1k  [0402-TIGHT]  26.8,91.69 180 top
R100  100  [0402-TIGHT]  20.51,119.95 270 top
R101  100  [0402-TIGHT]  22.1,119.95 270 top
R102  100  [0402-TIGHT]  23.69,119.95 270 top
R103  100  [0402-TIGHT]  18.61,119.95 270 top
R104  100  [0402-TIGHT]  17.02,119.95 270 top
R105  100  [0402-TIGHT]  15.43,119.95 270 top
R106  10Ω  [0402-TIGHT]  13.84,106.93 0 top
R107  10Ω  [0402-TIGHT]  13.84,108.84 0 top
R108  10Ω  [0402-TIGHT]  13.84,109.79 0 top
R109  10Ω  [0402-TIGHT]  13.84,105.98 0 top
R110  10Ω  [0402-TIGHT]  13.84,107.89 0 top
R111  100k  [0402-TIGHT]  13.04,95.49 270 top
R112  10Ω  [0402-TIGHT]  15.58,111.36 45 top
R113  2.2k  [0402-TIGHT]  39.41,93.06 180 top
R114  2.2k  [0402-TIGHT]  39.42,94.05 180 top
R115  1k  [0402-TIGHT]  52.7,91.69 180 top
R116  100  [0402-TIGHT]  46.42,119.95 270 top
R117  100  [0402-TIGHT]  48.01,119.95 270 top
R118  100  [0402-TIGHT]  49.59,119.95 270 top
R119  100  [0402-TIGHT]  44.51,119.95 270 top
R120  100  [0402-TIGHT]  42.93,119.95 270 top
R121  100  [0402-TIGHT]  41.34,119.95 270 top
R122  10Ω  [0402-TIGHT]  39.75,106.93 0 top
R123  10Ω  [0402-TIGHT]  39.75,108.84 0 top
R124  10Ω  [0402-TIGHT]  39.75,109.79 0 top
R125  10Ω  [0402-TIGHT]  39.75,105.98 0 top
R126  10Ω  [0402-TIGHT]  39.75,107.89 0 top
R127  100k  [0402-TIGHT]  38.95,95.49 270 top
R128  10Ω  [0402-TIGHT]  41.49,111.36 45 top
R129  2.2k  [0402-TIGHT]  65.31,93.06 180 top
R130  2.2k  [0402-TIGHT]  65.32,94.05 180 top
R131  1k  [0402-TIGHT]  78.61,91.69 180 top
R132  100  [0402-TIGHT]  72.33,119.95 270 top
R133  100  [0402-TIGHT]  73.91,119.95 270 top
R134  100  [0402-TIGHT]  75.5,119.95 270 top
R135  100  [0402-TIGHT]  70.42,119.95 270 top
R136  100  [0402-TIGHT]  68.83,119.95 270 top
R137  100  [0402-TIGHT]  67.25,119.95 270 top
R138  10Ω  [0402-TIGHT]  65.66,106.93 0 top
R139  10Ω  [0402-TIGHT]  65.66,108.84 0 top
R140  10Ω  [0402-TIGHT]  65.66,109.79 0 top
R141  10Ω  [0402-TIGHT]  65.66,105.98 0 top
R142  10Ω  [0402-TIGHT]  65.66,107.89 0 top
R143  100k  [0402-TIGHT]  64.86,95.49 270 top
R144  10Ω  [0402-TIGHT]  67.4,111.36 45 top
R145  2.2k  [0402-TIGHT]  13.5,134.21 180 top
R146  2.2k  [0402-TIGHT]  13.51,135.2 180 top
R147  1k  [0402-TIGHT]  26.8,132.84 180 top
R148  100  [0402-TIGHT]  20.51,161.1 270 top
R149  100  [0402-TIGHT]  22.1,161.1 270 top
R150  100  [0402-TIGHT]  23.69,161.1 270 top
R151  100  [0402-TIGHT]  18.61,161.1 270 top
R152  100  [0402-TIGHT]  17.02,161.1 270 top
R153  100  [0402-TIGHT]  15.43,161.1 270 top
R154  10Ω  [0402-TIGHT]  13.84,148.08 0 top
R155  10Ω  [0402-TIGHT]  13.84,149.99 0 top
R156  10Ω  [0402-TIGHT]  13.84,150.94 0 top
R157  10Ω  [0402-TIGHT]  13.84,147.13 0 top
R158  10Ω  [0402-TIGHT]  13.84,149.03 0 top
R159  100k  [0402-TIGHT]  13.04,136.64 270 top
R160  10Ω  [0402-TIGHT]  15.58,152.51 45 top
R161  2.2k  [0402-TIGHT]  39.41,134.21 180 top
R162  2.2k  [0402-TIGHT]  39.42,135.2 180 top
R163  1k  [0402-TIGHT]  52.7,132.84 180 top
R164  100  [0402-TIGHT]  46.42,161.1 270 top
R165  100  [0402-TIGHT]  48.01,161.1 270 top
R166  100  [0402-TIGHT]  49.59,161.1 270 top
R167  100  [0402-TIGHT]  44.51,161.1 270 top
R168  100  [0402-TIGHT]  42.93,161.1 270 top
R169  100  [0402-TIGHT]  41.34,161.1 270 top
R170  10Ω  [0402-TIGHT]  39.75,148.08 0 top
R171  10Ω  [0402-TIGHT]  39.75,149.99 0 top
R172  10Ω  [0402-TIGHT]  39.75,150.94 0 top
R173  10Ω  [0402-TIGHT]  39.75,147.13 0 top
R174  10Ω  [0402-TIGHT]  39.75,149.03 0 top
R175  100k  [0402-TIGHT]  38.95,136.64 270 top
R176  10Ω  [0402-TIGHT]  41.49,152.51 45 top
R177  2.2k  [0402-TIGHT]  65.31,134.21 180 top
R178  2.2k  [0402-TIGHT]  65.32,135.2 180 top
R179  1k  [0402-TIGHT]  78.61,132.84 180 top
R180  100  [0402-TIGHT]  72.33,161.1 270 top
R181  100  [0402-TIGHT]  73.91,161.1 270 top
R182  100  [0402-TIGHT]  75.5,161.1 270 top
R183  100  [0402-TIGHT]  70.42,161.1 270 top
R184  100  [0402-TIGHT]  68.83,161.1 270 top
R185  100  [0402-TIGHT]  67.25,161.1 270 top
R186  10Ω  [0402-TIGHT]  65.66,148.08 0 top
R187  10Ω  [0402-TIGHT]  65.66,149.99 0 top
R188  10Ω  [0402-TIGHT]  65.66,150.94 0 top
R189  10Ω  [0402-TIGHT]  65.66,147.13 0 top
R190  10Ω  [0402-TIGHT]  65.66,149.03 0 top
R191  100k  [0402-TIGHT]  64.86,136.64 270 top
R192  10Ω  [0402-TIGHT]  67.4,152.51 45 top
SPKVDD  [SMT-JUMPER_3_1-NC_TRACE_SILK]  16.38,18.29 270 bottom
SPKVDD1  [SMT-JUMPER_3_1-NC_TRACE_SILK]  42.29,18.29 270 bottom
SPKVDD2  [SMT-JUMPER_3_1-NC_TRACE_SILK]  68.2,18.29 270 bottom
SPKVDD3  [SMT-JUMPER_3_1-NC_TRACE_SILK]  16.38,59.44 270 bottom
SPKVDD4  [SMT-JUMPER_3_1-NC_TRACE_SILK]  42.29,59.44 270 bottom
SPKVDD5  [SMT-JUMPER_3_1-NC_TRACE_SILK]  68.2,59.44 270 bottom
SPKVDD6  [SMT-JUMPER_3_1-NC_TRACE_SILK]  16.38,100.58 270 bottom
SPKVDD7  [SMT-JUMPER_3_1-NC_TRACE_SILK]  42.29,100.58 270 bottom
SPKVDD8  [SMT-JUMPER_3_1-NC_TRACE_SILK]  68.2,100.58 270 bottom
SPKVDD9  [SMT-JUMPER_3_1-NC_TRACE_SILK]  16.38,141.73 270 bottom
SPKVDD10  [SMT-JUMPER_3_1-NC_TRACE_SILK]  42.29,141.73 270 bottom
SPKVDD11  [SMT-JUMPER_3_1-NC_TRACE_SILK]  68.2,141.73 270 bottom
U1  WM8960  [QFN-32]  45.47,29.08 270 top
U2  XC6222B331MR-G  [SOT23-5]  41.97,14.76 270 top
U3  XC6222B331MR-G  [SOT23-5]  16.07,14.76 270 top
U4  WM8960  [QFN-32]  19.56,29.08 270 top
U5  WM8960  [QFN-32]  71.37,29.08 270 top
U6  XC6222B331MR-G  [SOT23-5]  67.88,14.76 270 top
U7  WM8960  [QFN-32]  19.56,70.23 270 top
U8  XC6222B331MR-G  [SOT23-5]  16.07,55.91 270 top
U9  WM8960  [QFN-32]  45.47,70.23 270 top
U10  XC6222B331MR-G  [SOT23-5]  41.97,55.91 270 top
U11  WM8960  [QFN-32]  71.37,70.23 270 top
U12  XC6222B331MR-G  [SOT23-5]  67.88,55.91 270 top
U13  WM8960  [QFN-32]  19.56,111.38 270 top
U14  XC6222B331MR-G  [SOT23-5]  16.07,97.05 270 top
U15  WM8960  [QFN-32]  45.47,111.38 270 top
U16  XC6222B331MR-G  [SOT23-5]  41.97,97.05 270 top
U17  WM8960  [QFN-32]  71.37,111.38 270 top
U18  XC6222B331MR-G  [SOT23-5]  67.88,97.05 270 top
U19  WM8960  [QFN-32]  19.56,152.53 270 top
U20  XC6222B331MR-G  [SOT23-5]  16.07,138.2 270 top
U21  WM8960  [QFN-32]  45.47,152.53 270 top
U22  XC6222B331MR-G  [SOT23-5]  41.97,138.2 270 top
U23  WM8960  [QFN-32]  71.37,152.53 270 top
U24  XC6222B331MR-G  [SOT23-5]  67.88,138.2 270 top
U$1  [AUDIO8960896055]  19.32,24.64 0 bottom
U$2  [CODEC8960896056]  19.32,23.05 0 bottom
U$3  [CODEC8960896057]  18.42,44.42 0 top
U$4  [#GND#8]  10.69,10.63 0 bottom
U$5  [#BCLK#0]  11.05,43.69 0 top
U$6  [#SR##4]  54.76,10.63 0 top
U$7  [#GND#8]  10.73,10.62 0 top
U$8  [#GND#8]  10.68,8.13 0 top
U$9  [#GND#8]  10.68,8.13 0 bottom
U$10  [#AVDD#22]  27.87,18.26 0 bottom
U$11  [#GND#8]  10.73,46.23 0 bottom
U$12  [#GND#8]  28.36,46.23 0 bottom
U$13  [#SR##4]  28.85,10.63 0 top
U$14  [#SL##6]  28.88,13.17 0 top
U$15  [#SR##5]  28.85,8.06 0 top
U$16  [#SL##7]  28.83,15.74 0 top
U$17  [#GND#8]  10.79,20.81 0 bottom
U$18  [#GND#8]  10.79,23.34 0 top
U$19  [#GND#8]  10.79,20.8 0 top
U$20  [#AVDD#ISO#0]  16.46,14.8 0 bottom
U$21  [#3V3#0]  18.95,19.5 0 bottom
U$22  [#VIN#0]  18.78,17.08 0 bottom
U$23  [#ALRC#0]  11.18,36.07 0 top
U$24  [#DLRC#1]  11.1,41.15 0 top
U$25  [#SR##5]  54.76,8.06 0 top
U$26  [#HPL#10]  28.63,25.86 0 top
U$27  [#HPR#11]  28.6,20.78 0 top
U$28  [#3V3#12]  10.67,25.91 0 top
U$29  [SFE_LOGO_FLAME_.1]  21.1,43.53 0 top
U$30  [#SPKVDD#51]  12.1,18.24 0 top
U$31  [#GND#8]  10.73,46.23 0 top
U$32  [#GND#8]  28.36,46.23 0 top
U$33  [#SL##6]  54.79,13.17 0 top
U$34  [##EN##1]  10.19,13.18 0 top
U$35  [PWR12]  25.27,9.08 90 top
U$36  [WM8960896054]  19.32,21.46 0 bottom
U$37  [#OUT3#0]  27.84,23.34 0 bottom
U$38  [##EN##2]  10.19,13.16 0 bottom
U$39  [#LED#17]  21.66,9.38 90 bottom
U$40  [#I2C#18]  16.21,11.08 270 bottom
U$41  [#OUT3#4]  28.22,23.37 0 top
U$42  [#SL##7]  54.74,15.74 0 top
U$43  [#GND#8]  36.7,23.34 0 top
U$44  [#RINPUT1#0]  26.9,38.52 0 bottom
U$45  [#VIN#19]  10.46,15.76 0 top
U$46  [#VIN#19]  10.45,15.75 0 bottom
U$47  [#RINPUT2#0]  26.72,41.1 0 bottom
U$48  [#AVDD#22]  27.86,18.26 0 top
U$49  [#RINPUT3#0]  26.77,43.64 0 bottom
U$50  [#GND#8]  10.79,23.35 0 bottom
U$51  [#3V3#12]  10.65,25.91 0 bottom
U$52  [#ADCLRC#2]  12.24,36.09 0 bottom
U$53  [#HPL#10]  54.53,25.86 0 top
U$54  [#RIN3#0]  28.33,43.64 0 top
U$55  [#DACLRC#4]  12.24,41.15 0 bottom
U$56  [#RIN2#0]  28.33,41.1 0 top
U$57  [#BCLK#5]  11.13,43.71 0 bottom
U$58  [#ADCDAT#6]  12.43,33.52 0 bottom
U$59  [#MICB#31]  28.24,28.41 0 top
U$60  [WM89600]  19.53,42.87 0 top
U$61  [AUDIO0]  18.33,45.99 0 top
U$62  [#LINPUT1#0]  26.91,36.04 0 bottom
U$63  [#LINPUT2#0]  26.77,33.47 0 bottom
U$64  [#SPKVDD#51]  12.08,18.24 0 bottom
U$65  [#LINPUT3#0]  26.78,30.95 0 bottom
U$66  [#SCL#0]  10.37,31.02 0 top
U$67  [#SDA#0]  10.52,28.39 0 top
U$68  [#RIN1#0]  28.33,38.56 0 top
U$69  [#DDAT#9]  11.34,38.63 0 top
U$70  [#DACDAT#8]  12.41,38.59 0 bottom
U$71  [#ADAT#10]  11.15,33.6 0 top
U$72  [#HPR#11]  54.51,20.78 0 top
U$73  [#3V3#12]  36.58,25.91 0 top
U$74  [#SCL#40]  10.56,31.01 0 bottom
U$75  [#SDA#41]  10.71,28.5 0 bottom
U$76  [#LIN1#0]  28.33,36.02 0 top
U$77  [#LIN2#0]  28.33,33.48 0 top
U$78  [#LIN3#0]  28.33,30.94 0 top
U$79  [#MICBIAS#42]  26.88,28.43 0 bottom
U$80  [#HPL#43]  28.51,25.92 0 bottom
U$81  [SFE_LOGO_FLAME_.1]  47.01,43.53 0 top
U$82  [#HPR#45]  28.45,20.83 0 bottom
U$83  [#SPK_LP#46]  27.02,15.74 0 bottom
U$84  [#SPK_LN#47]  26.97,13.19 0 bottom
U$85  [#SPK_RP#48]  26.96,10.62 0 bottom
U$86  [#SPK_RN#49]  26.95,8.06 0 bottom
U$87  [PWR12]  51.18,9.08 90 top
U$88  [#LED#17]  47.57,9.38 90 bottom
U$89  [#I2C#18]  42.12,11.08 270 bottom
U$90  [#VIN#19]  36.37,15.76 0 top
U$91  [#VIN#19]  36.36,15.75 0 bottom
U$92  [#AVDD#22]  53.77,18.26 0 top
U$93  [#GND#8]  36.7,23.35 0 bottom
U$94  [#3V3#12]  36.56,25.91 0 bottom
U$95  [#MICB#31]  54.15,28.41 0 top
U$96  [WM89600]  45.44,42.87 0 top
U$97  [AUDIO0]  44.24,45.99 0 top
U$98  [#SCL#40]  36.47,31.01 0 bottom
U$99  [#SDA#41]  36.62,28.5 0 bottom
U$100  [#MICBIAS#42]  52.79,28.43 0 bottom
U$101  [#HPL#43]  54.42,25.92 0 bottom
U$102  [#HPR#45]  54.36,20.83 0 bottom
U$103  [#SPK_LP#46]  52.93,15.74 0 bottom
U$104  [#SPK_LN#47]  52.88,13.19 0 bottom
U$105  [#SPK_RP#48]  52.87,10.62 0 bottom
U$106  [#SPK_RN#49]  52.85,8.06 0 bottom
U$107  [#SPKVDD#51]  37.99,18.24 0 bottom
U$108  [WM8960896054]  45.22,21.46 0 bottom
U$109  [AUDIO8960896055]  45.22,24.64 0 bottom
U$110  [CODEC8960896056]  45.22,23.05 0 bottom
U$111  [CODEC8960896057]  44.33,44.42 0 top
U$112  [#OUT3#0]  53.74,23.34 0 bottom
U$113  [#GND#8]  36.64,10.62 0 top
U$114  [#GND#8]  36.59,8.13 0 top
U$115  [#GND#8]  36.59,8.13 0 bottom
U$116  [#AVDD#22]  53.78,18.26 0 bottom
U$117  [#GND#8]  36.6,10.63 0 bottom
U$118  [#GND#8]  36.64,46.23 0 bottom
U$119  [#GND#8]  54.27,46.23 0 bottom
U$120  [#GND#8]  36.7,20.81 0 bottom
U$121  [#GND#8]  36.7,20.8 0 top
U$122  [#SPKVDD#51]  38.01,18.24 0 top
U$123  [#GND#8]  36.64,46.23 0 top
U$124  [#GND#8]  54.27,46.23 0 top
U$125  [##EN##1]  36.09,13.18 0 top
U$126  [##EN##2]  36.09,13.16 0 bottom
U$127  [#OUT3#4]  54.13,23.37 0 top
U$128  [#RINPUT1#0]  52.81,38.52 0 bottom
U$129  [#RINPUT2#0]  52.62,41.1 0 bottom
U$130  [#RINPUT3#0]  52.68,43.64 0 bottom
U$131  [#LINPUT1#0]  52.82,36.04 0 bottom
U$132  [#LINPUT2#0]  52.68,33.47 0 bottom
U$133  [#LINPUT3#0]  52.68,30.95 0 bottom
U$134  [#AVDD#ISO#0]  42.37,14.8 0 bottom
U$135  [#3V3#0]  44.86,19.5 0 bottom
U$136  [#VIN#0]  44.69,17.08 0 bottom
U$137  [#SCL#0]  36.28,31.02 0 top
U$138  [#SDA#0]  36.42,28.39 0 top
U$139  [#RIN3#0]  54.24,43.64 0 top
U$140  [#RIN2#0]  54.24,41.1 0 top
U$141  [#RIN1#0]  54.24,38.56 0 top
U$142  [#LIN1#0]  54.24,36.02 0 top
U$143  [#LIN2#0]  54.24,33.48 0 top
U$144  [#LIN3#0]  54.24,30.94 0 top
U$145  [#BCLK#0]  36.96,43.69 0 top
U$146  [#ALRC#0]  37.08,36.07 0 top
U$147  [#DLRC#1]  37.01,41.15 0 top
U$148  [#ADCLRC#2]  38.15,36.09 0 bottom
U$149  [#DACLRC#4]  38.15,41.15 0 bottom
U$150  [#BCLK#5]  37.03,43.71 0 bottom
U$151  [#ADCDAT#6]  38.34,33.52 0 bottom
U$152  [#DACDAT#8]  38.32,38.59 0 bottom
U$153  [#DDAT#9]  37.25,38.63 0 top
U$154  [#ADAT#10]  37.06,33.6 0 top
U$155  [#SR##4]  80.67,10.63 0 top
U$156  [#SR##5]  80.67,8.06 0 top
U$157  [#SL##6]  80.7,13.17 0 top
U$158  [#SL##7]  80.65,15.74 0 top
U$159  [#GND#8]  62.61,23.34 0 top
U$160  [#HPL#10]  80.44,25.86 0 top
U$161  [#HPR#11]  80.42,20.78 0 top
U$162  [#3V3#12]  62.48,25.91 0 top
U$163  [SFE_LOGO_FLAME_.1]  72.92,43.53 0 top
U$164  [PWR12]  77.09,9.08 90 top
U$165  [#LED#17]  73.48,9.38 90 bottom
U$166  [#I2C#18]  68.02,11.08 270 bottom
U$167  [#VIN#19]  62.28,15.76 0 top
U$168  [#VIN#19]  62.27,15.75 0 bottom
U$169  [#AVDD#22]  79.67,18.26 0 top
U$170  [#GND#8]  62.61,23.35 0 bottom
U$171  [#3V3#12]  62.47,25.91 0 bottom
U$172  [#MICB#31]  80.06,28.41 0 top
U$173  [WM89600]  71.35,42.87 0 top
U$174  [AUDIO0]  70.15,45.99 0 top
U$175  [#SCL#40]  62.38,31.01 0 bottom
U$176  [#SDA#41]  62.53,28.5 0 bottom
U$177  [#MICBIAS#42]  78.7,28.43 0 bottom
U$178  [#HPL#43]  80.33,25.92 0 bottom
U$179  [#HPR#45]  80.26,20.83 0 bottom
U$180  [#SPK_LP#46]  78.83,15.74 0 bottom
U$181  [#SPK_LN#47]  78.79,13.19 0 bottom
U$182  [#SPK_RP#48]  78.78,10.62 0 bottom
U$183  [#SPK_RN#49]  78.76,8.06 0 bottom
U$184  [#SPKVDD#51]  63.9,18.24 0 bottom
U$185  [WM8960896054]  71.13,21.46 0 bottom
U$186  [AUDIO8960896055]  71.13,24.64 0 bottom
U$187  [CODEC8960896056]  71.13,23.05 0 bottom
U$188  [CODEC8960896057]  70.23,44.42 0 top
U$189  [#OUT3#0]  79.65,23.34 0 bottom
U$190  [#GND#8]  62.54,10.62 0 top
U$191  [#GND#8]  62.5,8.13 0 top
U$192  [#GND#8]  62.5,8.13 0 bottom
U$193  [#AVDD#22]  79.68,18.26 0 bottom
U$194  [#GND#8]  62.5,10.63 0 bottom
U$195  [#GND#8]  62.55,46.23 0 bottom
U$196  [#GND#8]  80.18,46.23 0 bottom
U$197  [#GND#8]  62.61,20.81 0 bottom
U$198  [#GND#8]  62.61,20.8 0 top
U$199  [#SPKVDD#51]  63.91,18.24 0 top
U$200  [#GND#8]  62.55,46.23 0 top
U$201  [#GND#8]  80.18,46.23 0 top
U$202  [##EN##1]  62,13.18 0 top
U$203  [##EN##2]  62,13.16 0 bottom
U$204  [#OUT3#4]  80.04,23.37 0 top
U$205  [#RINPUT1#0]  78.71,38.52 0 bottom
U$206  [#RINPUT2#0]  78.53,41.1 0 bottom
U$207  [#RINPUT3#0]  78.59,43.64 0 bottom
U$208  [#LINPUT1#0]  78.72,36.04 0 bottom
U$209  [#LINPUT2#0]  78.59,33.47 0 bottom
U$210  [#LINPUT3#0]  78.59,30.95 0 bottom
U$211  [#AVDD#ISO#0]  68.28,14.8 0 bottom
U$212  [#3V3#0]  70.77,19.5 0 bottom
U$213  [#VIN#0]  70.59,17.08 0 bottom
U$214  [#SCL#0]  62.19,31.02 0 top
U$215  [#SDA#0]  62.33,28.39 0 top
U$216  [#RIN3#0]  80.15,43.64 0 top
U$217  [#RIN2#0]  80.15,41.1 0 top
U$218  [#RIN1#0]  80.15,38.56 0 top
U$219  [#LIN1#0]  80.15,36.02 0 top
U$220  [#LIN2#0]  80.15,33.48 0 top
U$221  [#LIN3#0]  80.15,30.94 0 top
U$222  [#BCLK#0]  62.86,43.69 0 top
U$223  [#ALRC#0]  62.99,36.07 0 top
U$224  [#DLRC#1]  62.92,41.15 0 top
U$225  [#ADCLRC#2]  64.06,36.09 0 bottom
U$226  [#DACLRC#4]  64.06,41.15 0 bottom
U$227  [#BCLK#5]  62.94,43.71 0 bottom
U$228  [#ADCDAT#6]  64.25,33.52 0 bottom
U$229  [#DACDAT#8]  64.23,38.59 0 bottom
U$230  [#DDAT#9]  63.16,38.63 0 top
U$231  [#ADAT#10]  62.96,33.6 0 top
U$232  [#SR##4]  28.85,51.78 0 top
U$233  [#SR##5]  28.85,49.21 0 top